# Altium PCB HU_MAIN_PCB_revA.PcbDoc (part 1 of 3)
Units mm, origin at the board's own origin, x right, y up, seen from the top; angles counter-clockwise.
Board outline 136.5 x 85 mm, 4 copper layers (Top Layer, Layer 1, Layer 2, Bottom Layer), stack 1.586 mm thick; 169 components, 126 nets, 634 pads, 1057 vias.
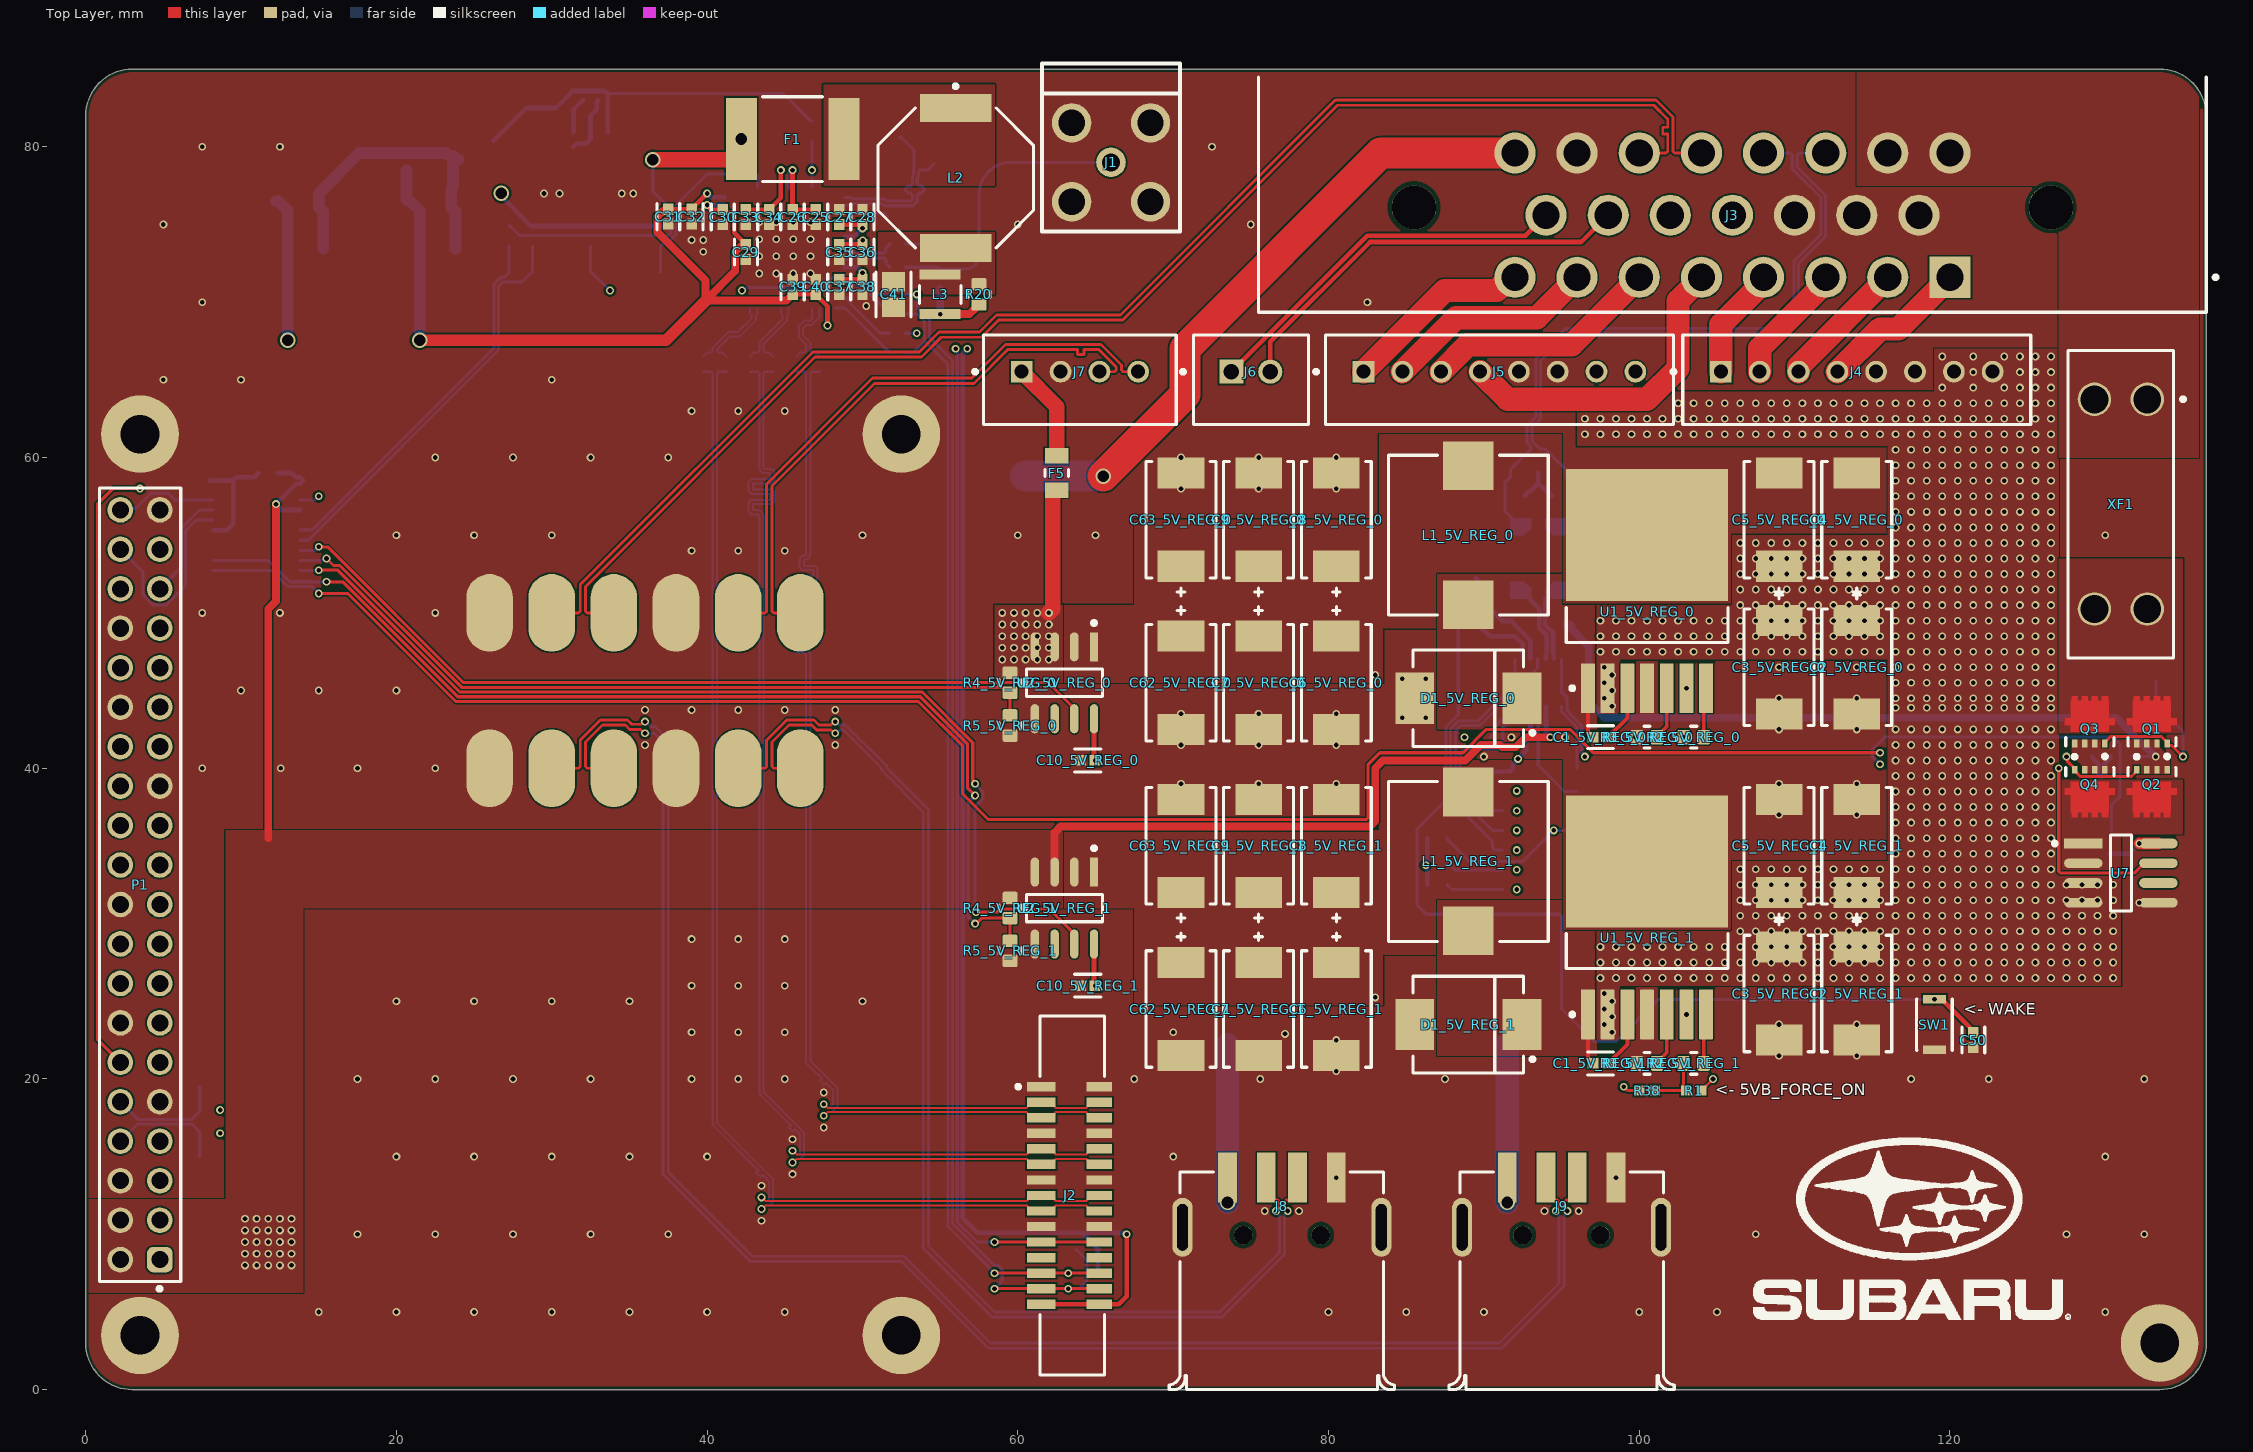
[diagram p0: Top Layer view]
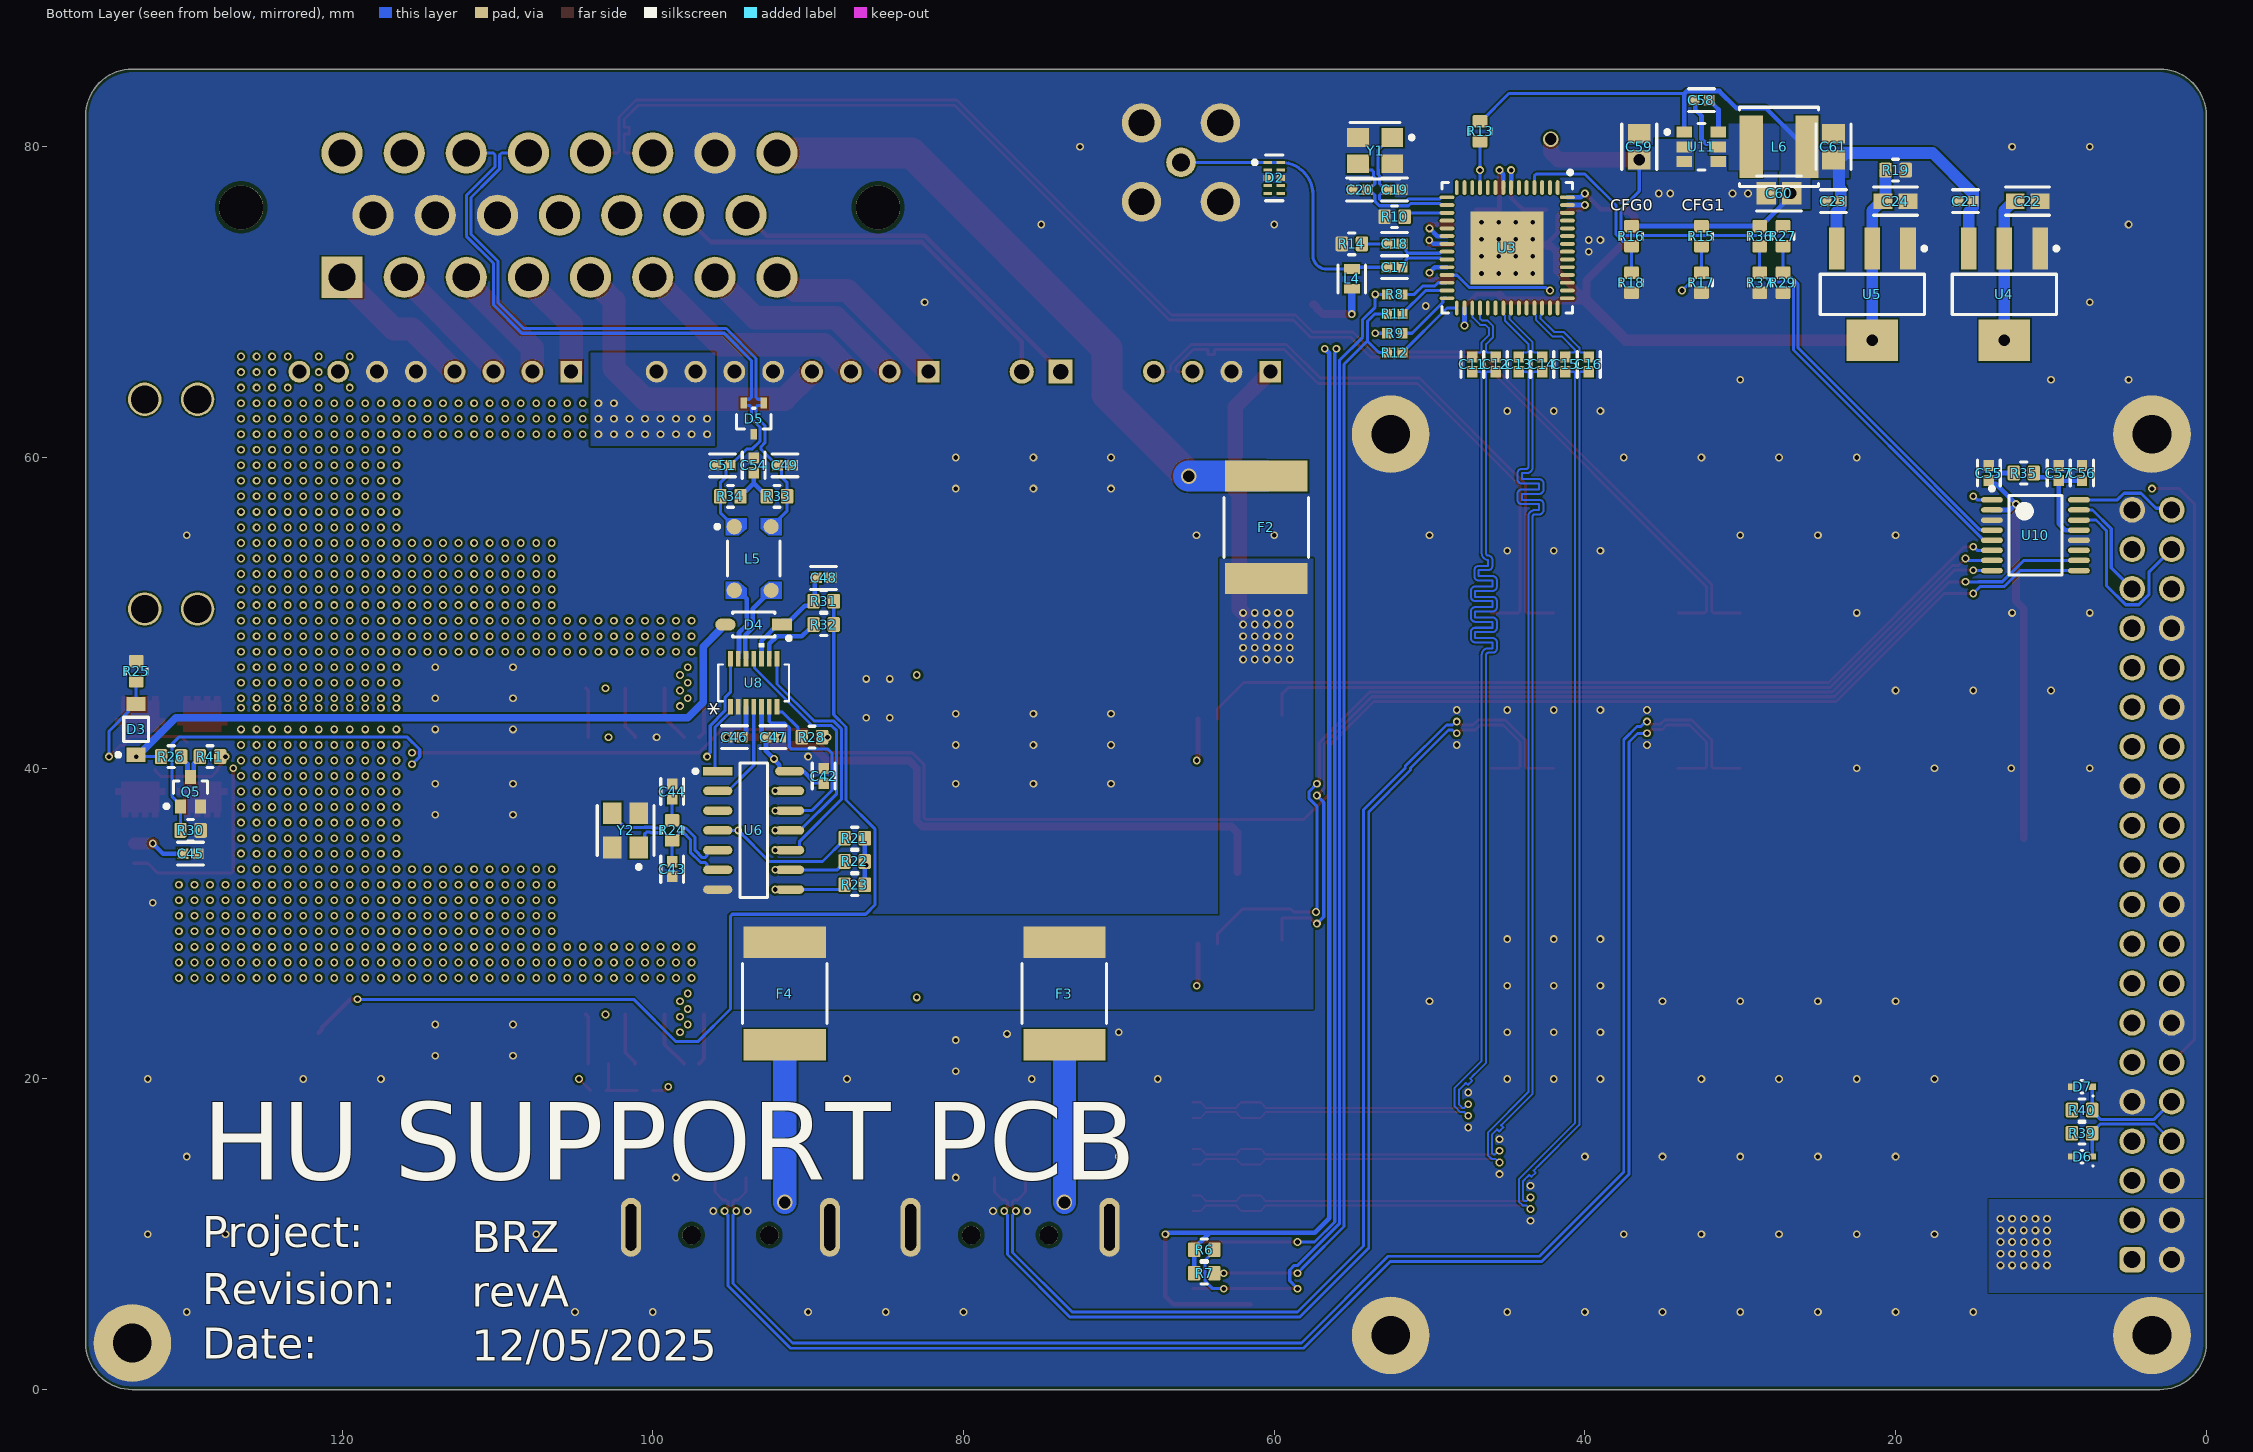
[diagram p1: Bottom Layer view, seen from below]
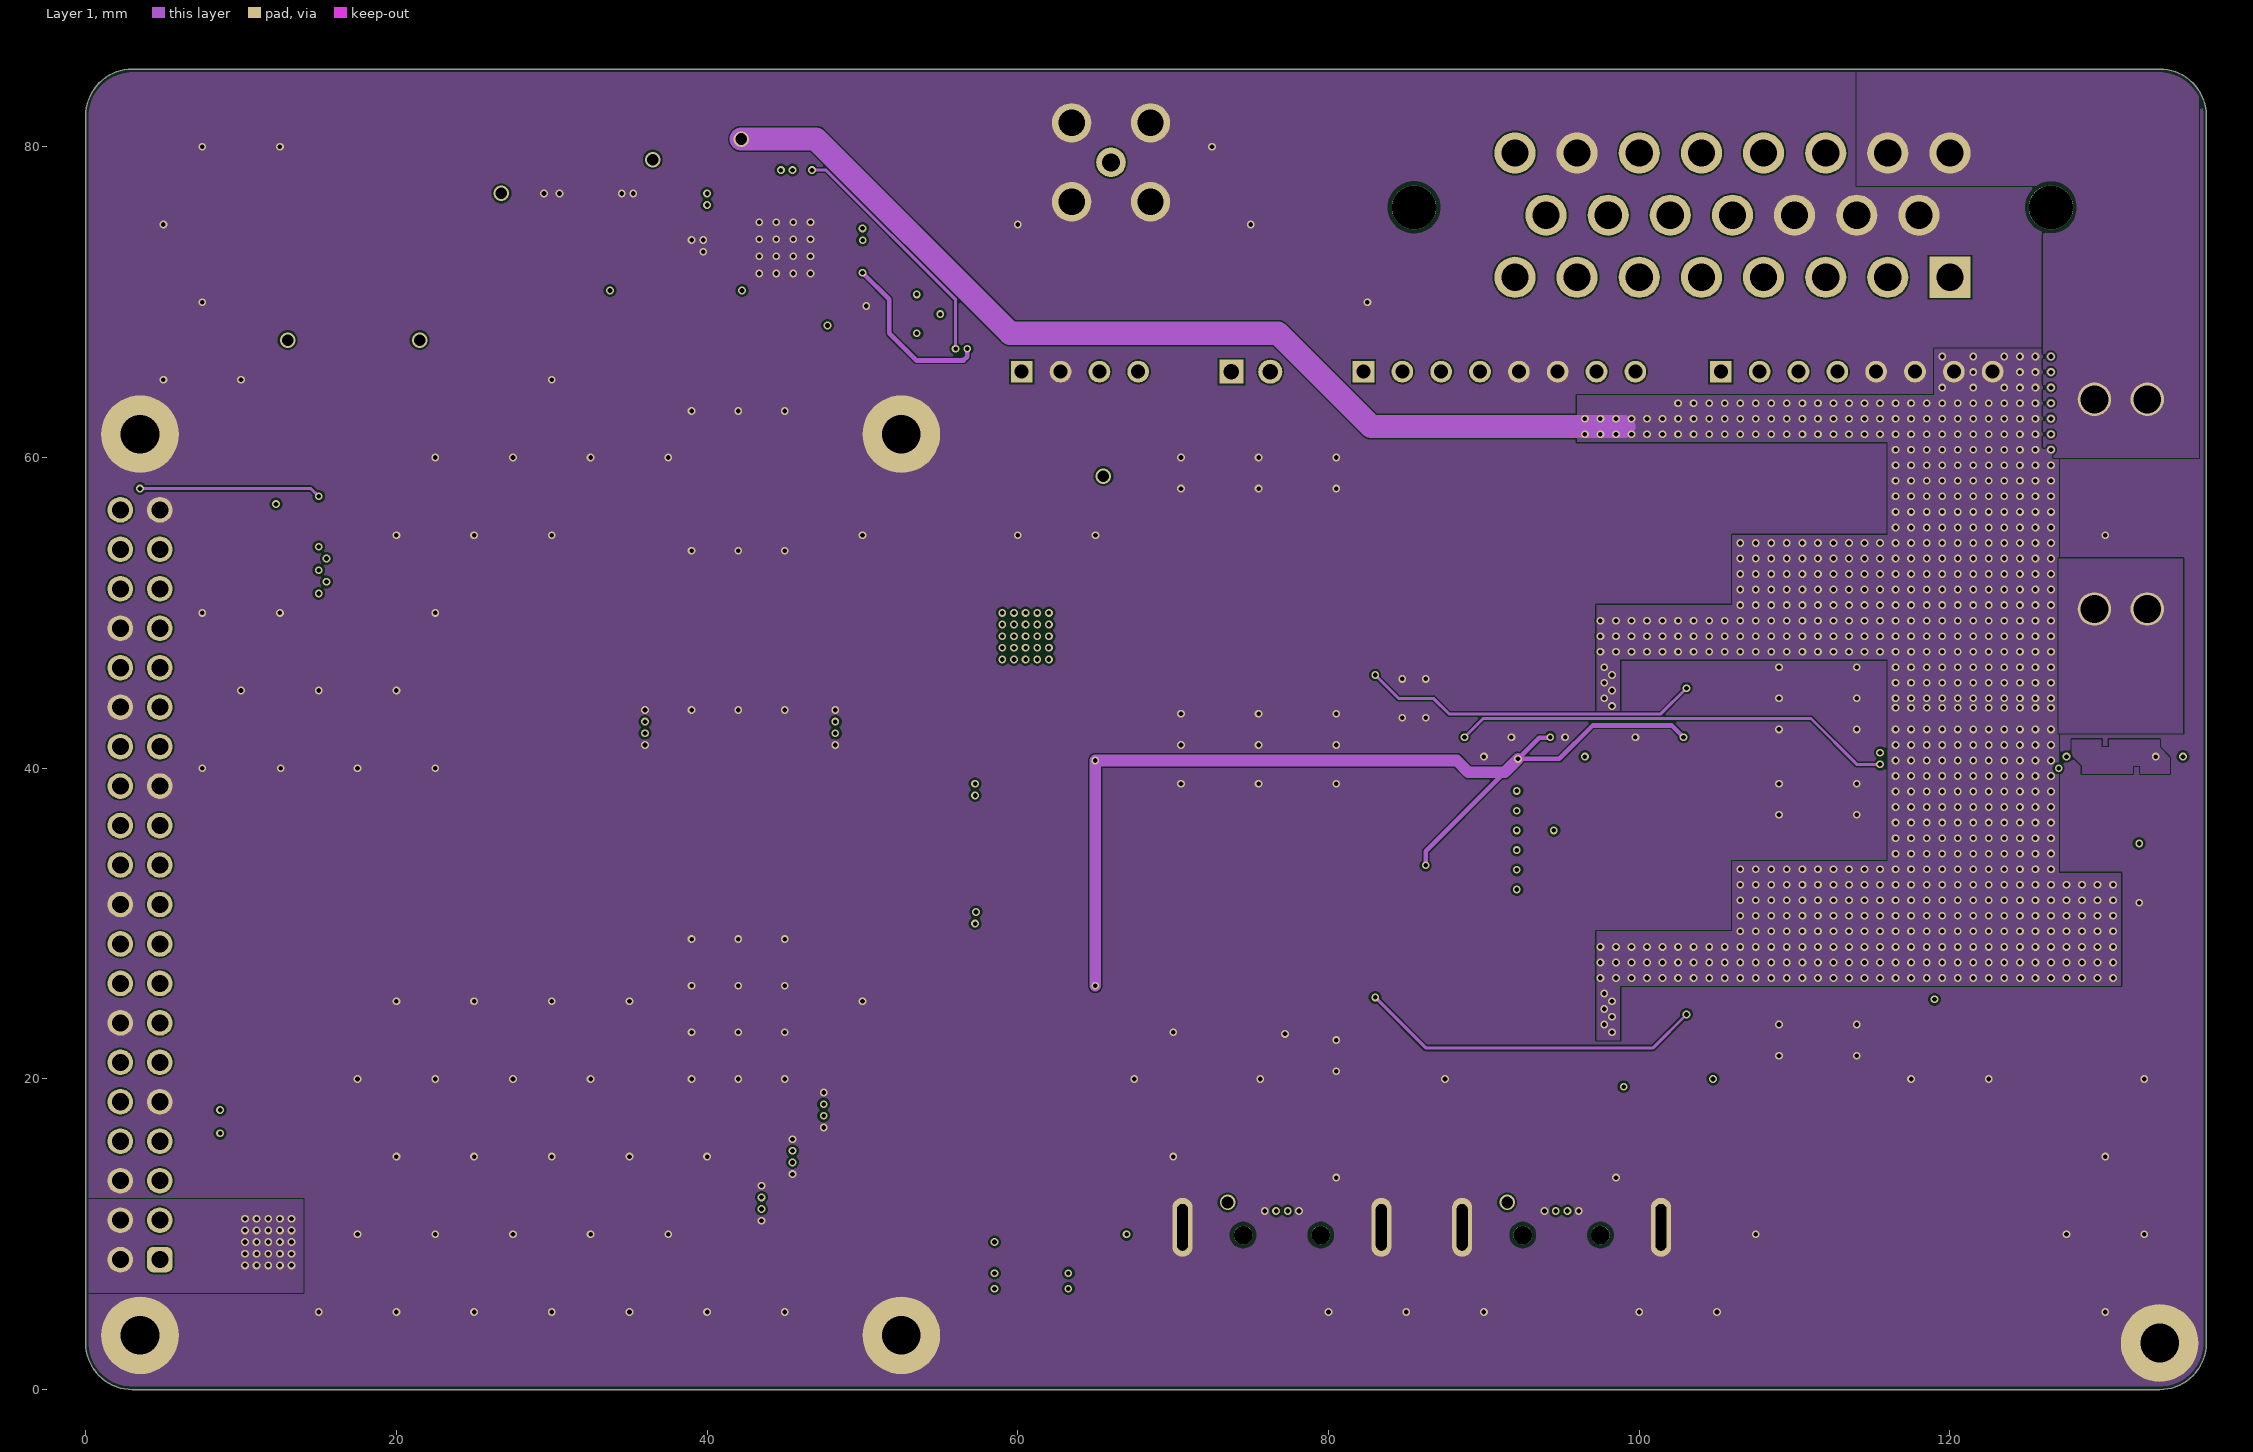
[diagram p2: Layer 1]
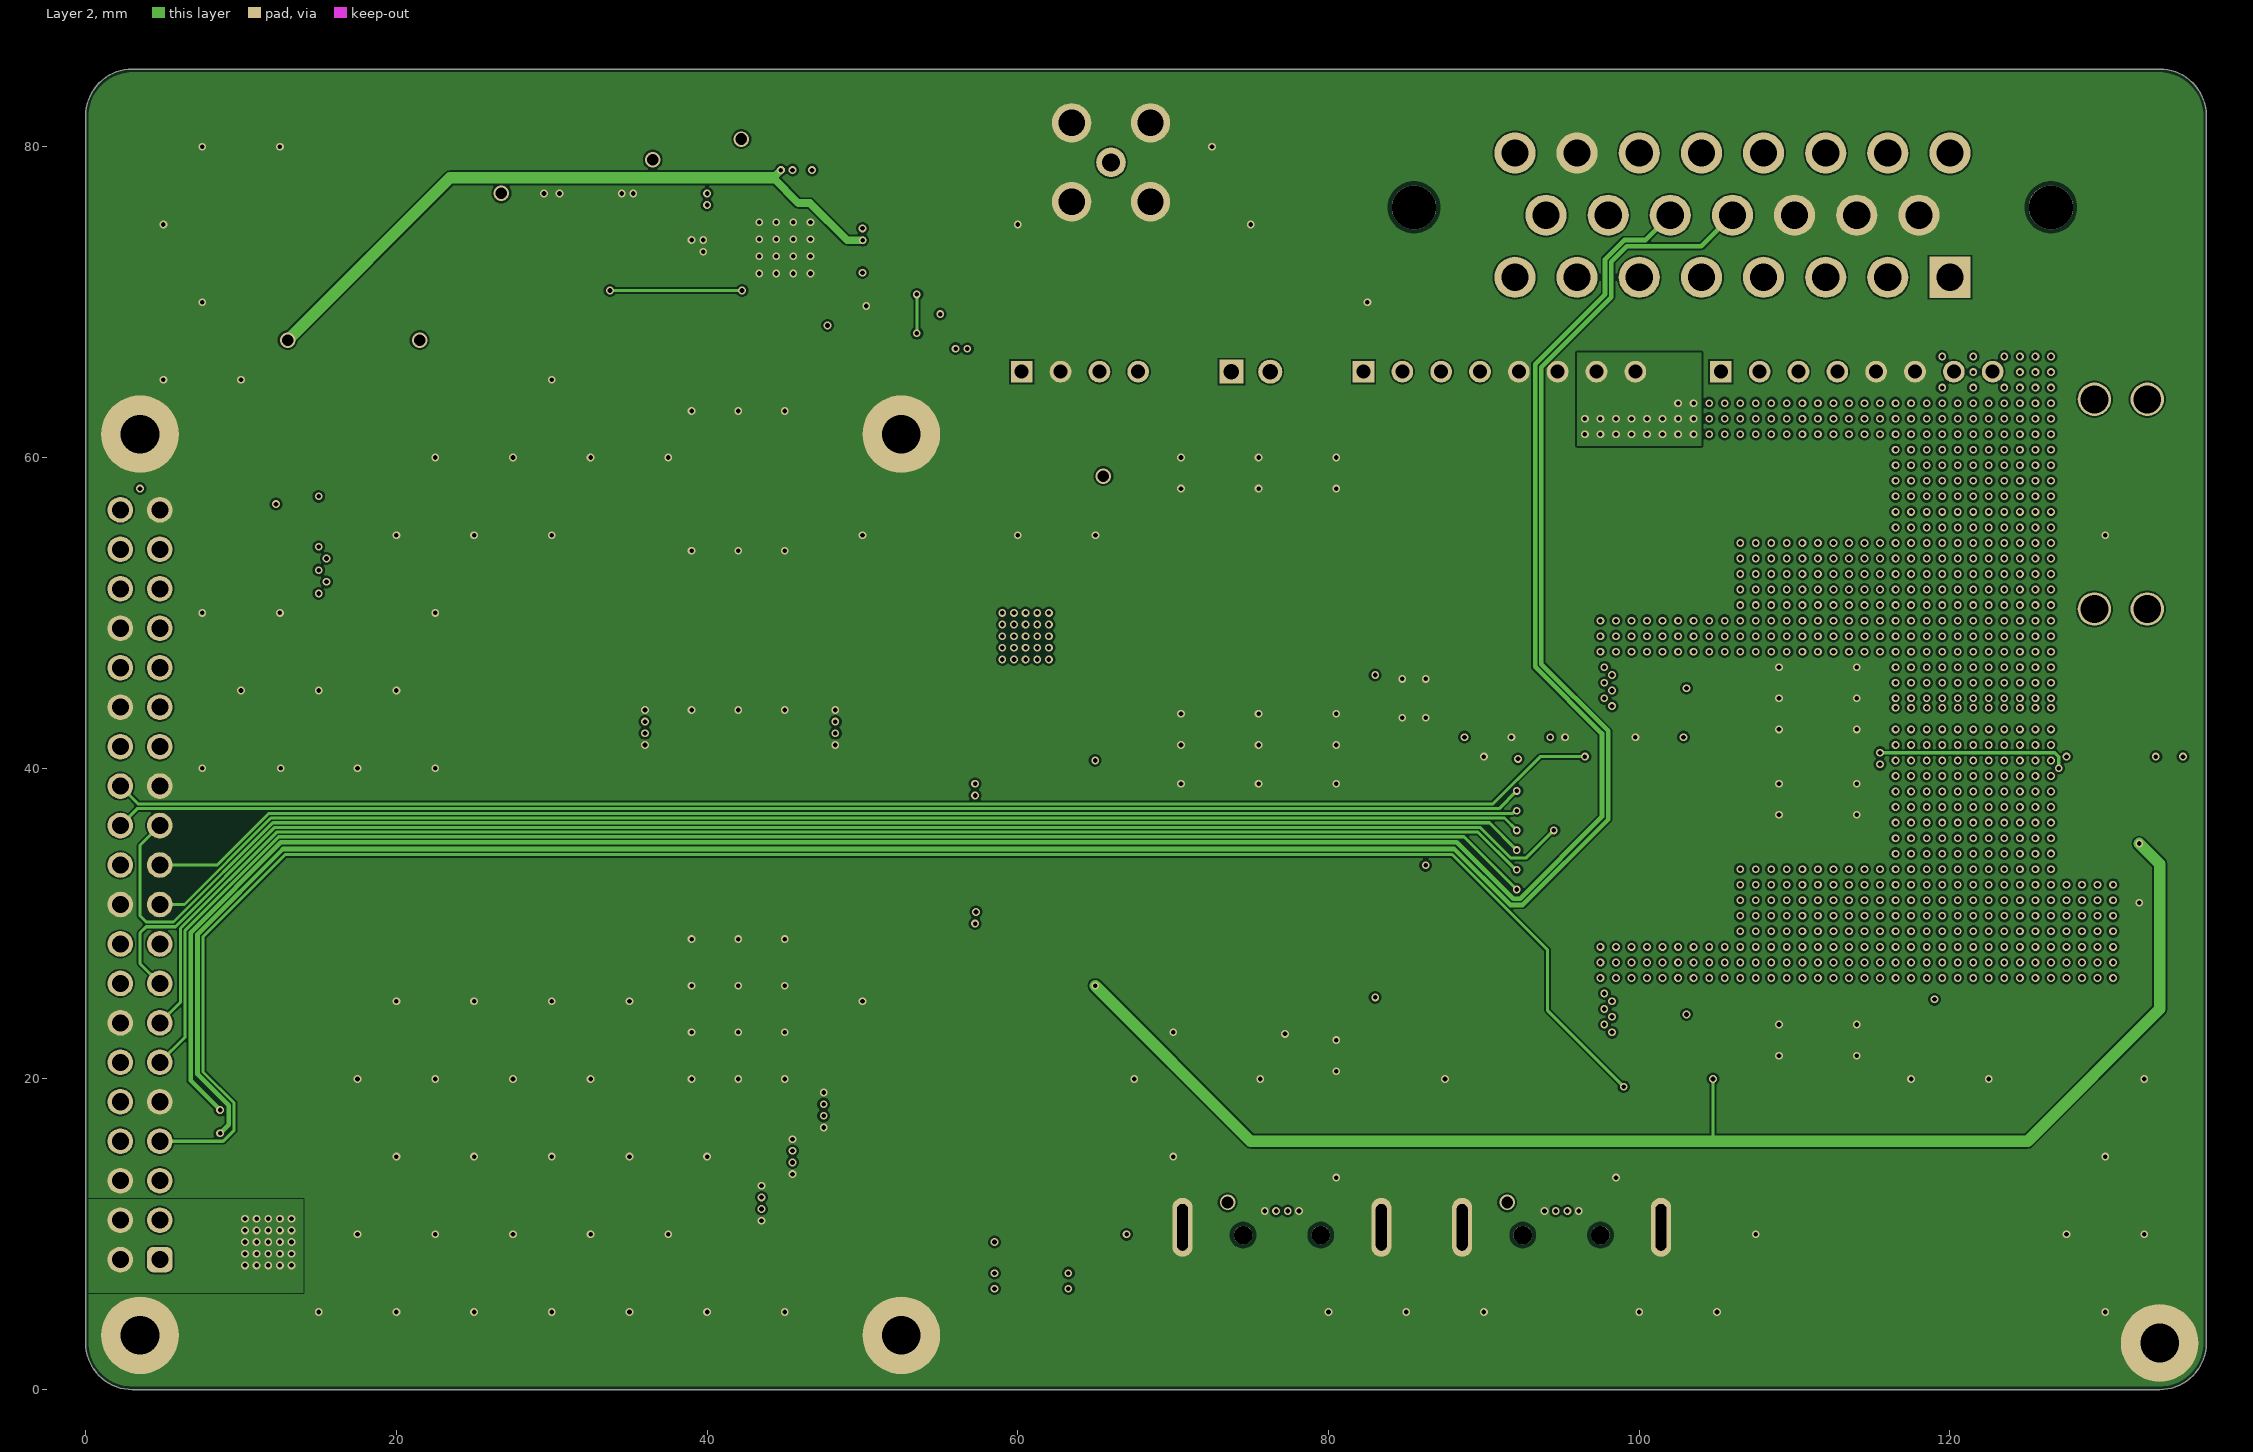
[diagram p3: Layer 2]
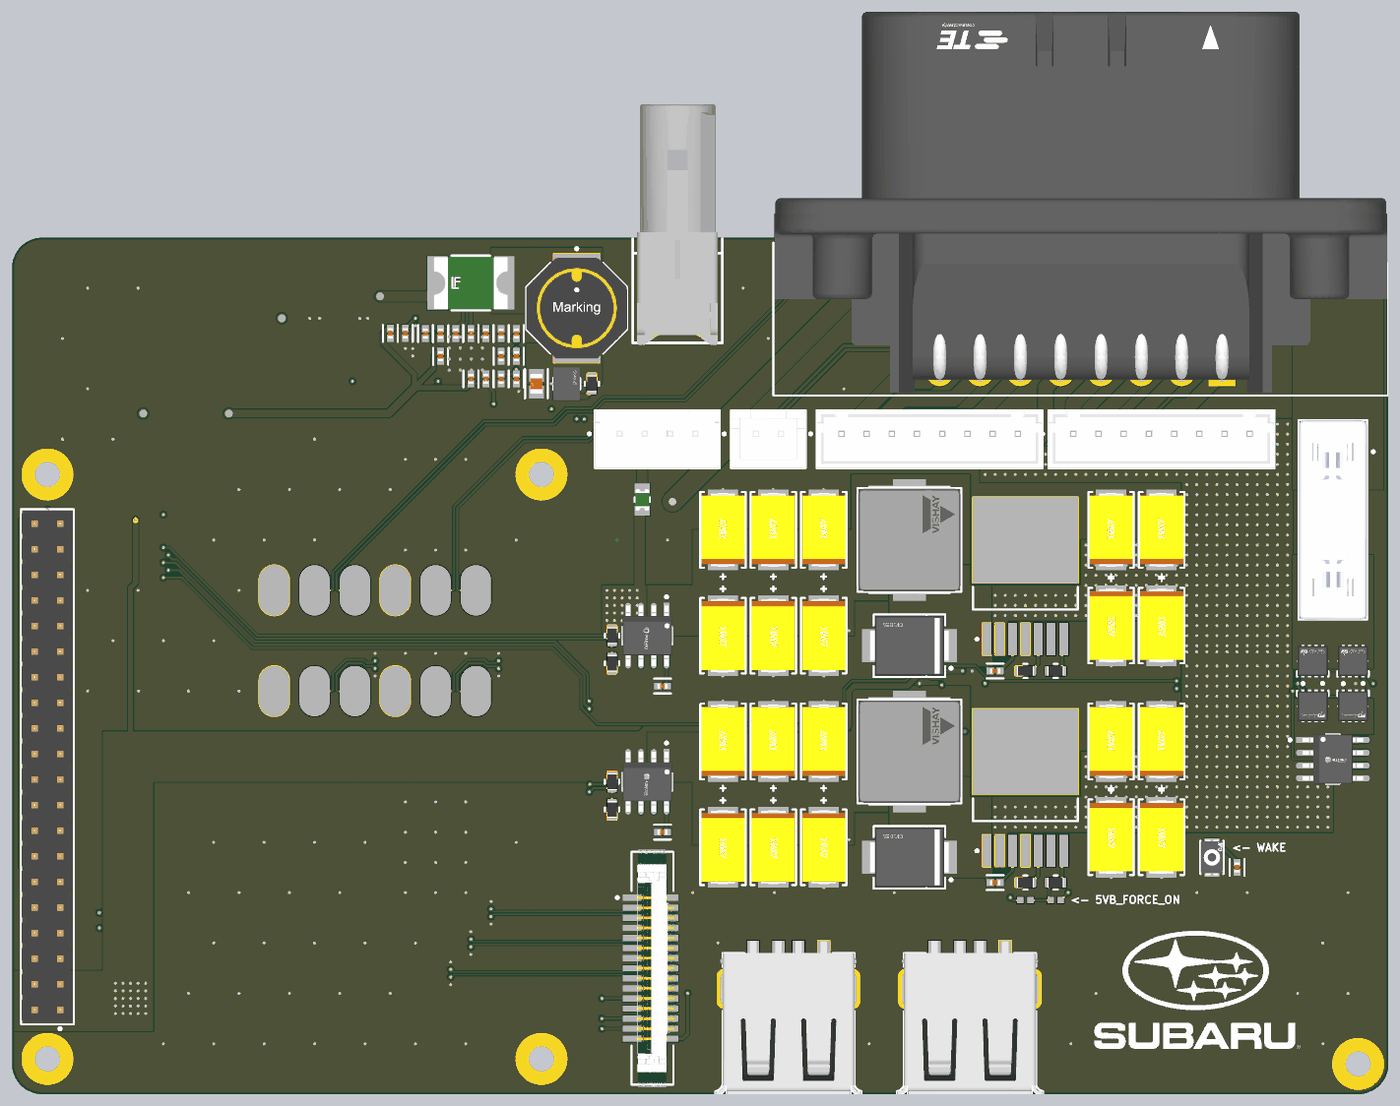
[diagram p5: 3D render of the assembled board from above, using the file's embedded part models]
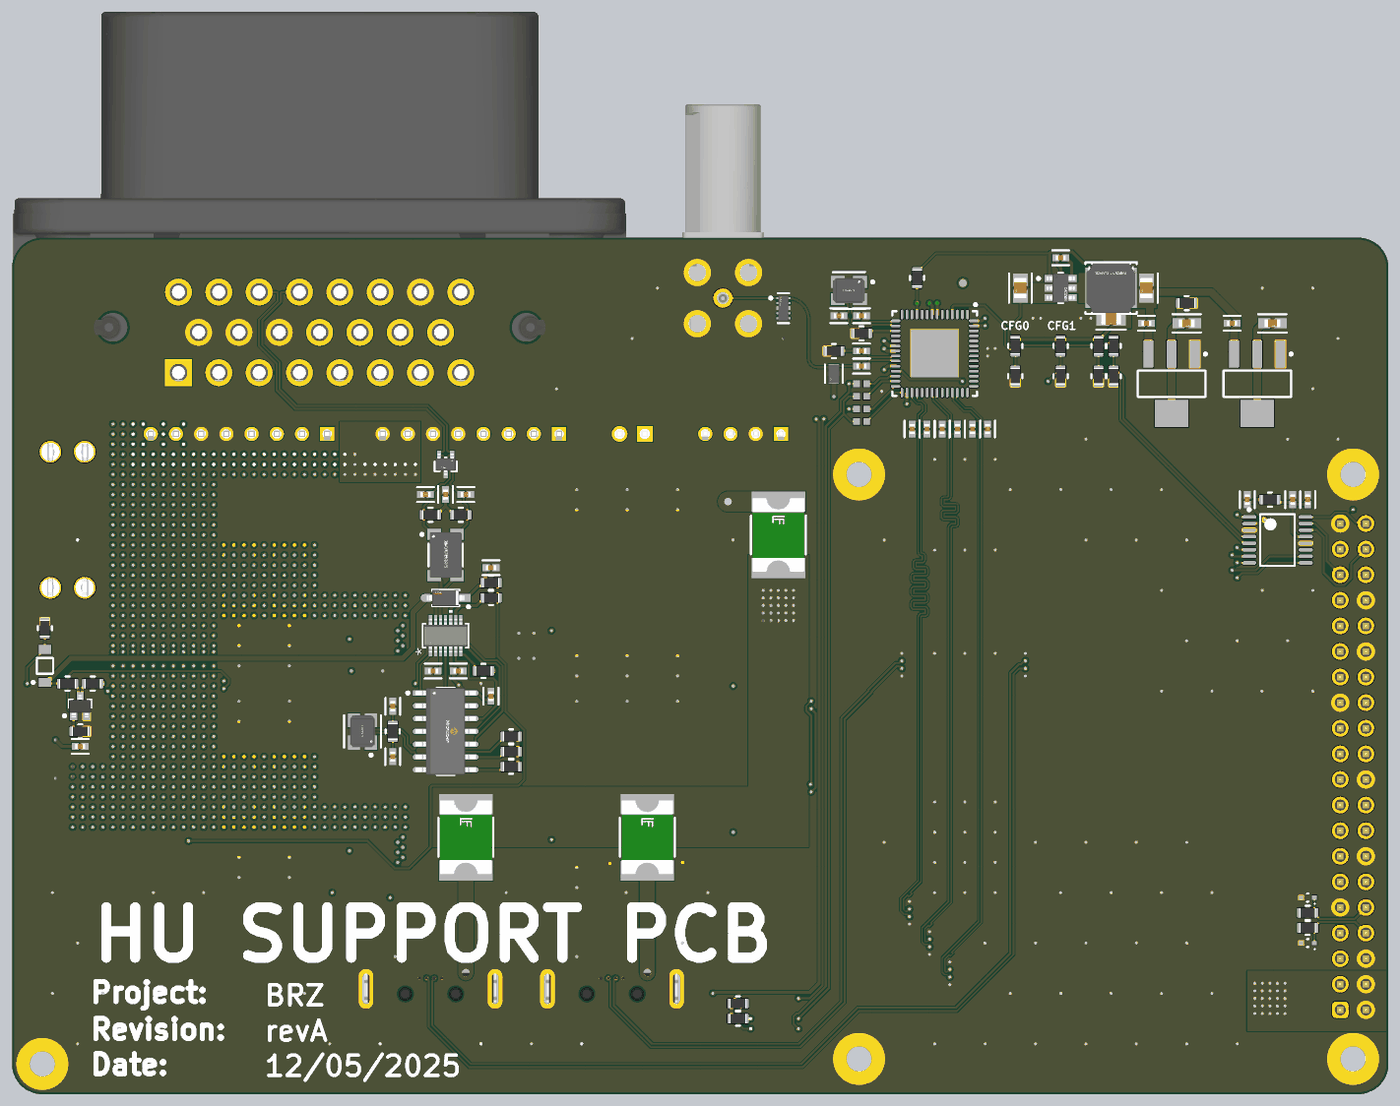
[diagram p6: 3D render of the assembled board from below, using the file's embedded part models]

## Layer stack, top to bottom
Top Solder: solder mask 0.0102, Solder Resist, Dk 3.5
Top Layer: signal copper 0.035
Dielectric 2: prepreg 0.2104, PP-006, Dk 4.1
Layer 1: signal copper 0.0152
Dielectric 1: dielectric 1.065, FR-4, Dk 4.8
Layer 2: signal copper 0.0152
Dielectric 3: prepreg 0.2104, PP-006, Dk 4.1
Bottom Layer: signal copper 0.035
Bottom Solder: solder mask 0.0102, Solder Resist, Dk 3.5

## Board outline
0,3 0,82 cw(c3,82) 3,85 133.5,85 cw(c133.5,82) 136.5,82 136.5,3 cw(c133.5,3) 133.5,0 3,0 cw(c3,3)

## Design rules (kind name [scope] priority, off if disabled: settings)
BoardOutlineClearance [All] p1: gap=0.2 ignorepadtopadclearanceinfootprint=FALSE
Clearance [All] p1: gap=0.102 ignorepadtopadclearanceinfootprint=FALSE except(0.127: Arc-Via Track-Via SMDPad-Via THPad-Via Via-Via Via-Fill Via-Poly Via-Region Via-Text; 0.25: Arc-Hole Track-Hole SMDPad-Hole THPad-Hole Via-Hole Fill-Hole Poly-Hole Region-Hole Text-Hole)
ComponentClearance [All] p1: gap=0.102 collisioncheckmode=3 verticalgap=0.102 showdistances=TRUE
DiffPairsRouting USB [InDifferentialPairClass('USB')] p1: maxlimit=0.15 minlimit=0.127 mostfreqgap=0.15 toplayer_mingap=0.15 toplayer_minwidth=0.184 toplayer_maxwidth=0.184 toplayer_prefwidth=0.184 midlayer1_maxgap=0.127 midlayer1_prefgap=0.127 midlayer1_minwidth=0.134 midlayer1_maxwidth=0.134 midlayer1_prefwidth=0.134 midlayer2_maxgap=0.127 midlayer2_prefgap=0.127 midlayer2_minwidth=0.134 midlayer2_maxwidth=0.134 midlayer2_prefwidth=0.134 bottomlayer_mingap=0.15 bottomlayer_minwidth=0.184 bottomlayer_maxwidth=0.184 bottomlayer_prefwidth=0.184 impedanceprofiledriven=TRUE impedanceprofileid={04CC540B-F58B-4300-971F-239DCF8936D9} impedanceprofilevalue=90.000000 maxuncoupledlength=12.7
DiffPairsRouting CSI [InDifferentialPairClass('CSI0') OR InDifferentialPairClass('CSI0_PRE') OR InDifferentialPairClass('100DIFF')] p2: maxlimit=0.15 minlimit=0.127 mostfreqgap=0.15 toplayer_mingap=0.15 toplayer_minwidth=0.13 toplayer_maxwidth=0.13 toplayer_prefwidth=0.13 midlayer1_maxgap=0.127 midlayer1_prefgap=0.127 midlayer1_minwidth=0.096 midlayer1_maxwidth=0.096 midlayer1_prefwidth=0.096 midlayer2_maxgap=0.127 midlayer2_prefgap=0.127 midlayer2_minwidth=0.096 midlayer2_maxwidth=0.096 midlayer2_prefwidth=0.096 bottomlayer_mingap=0.15 bottomlayer_minwidth=0.13 bottomlayer_maxwidth=0.13 bottomlayer_prefwidth=0.13 impedanceprofiledriven=TRUE impedanceprofileid={F67F527D-6E9B-4A25-A764-75998AE40894} impedanceprofilevalue=100.000000 maxuncoupledlength=12.7
DiffPairsRouting [All] p3: maxlimit=0.102 minlimit=0.102 mostfreqgap=0.102 toplayer_minwidth=0.102 toplayer_maxwidth=1816.048 toplayer_prefwidth=0.102 midlayer1_minwidth=0.102 midlayer1_maxwidth=1816.048 midlayer1_prefwidth=0.102 midlayer2_minwidth=0.102 midlayer2_maxwidth=1816.048 midlayer2_prefwidth=0.102 bottomlayer_minwidth=0.102 bottomlayer_maxwidth=1816.048 bottomlayer_prefwidth=0.102 maxuncoupledlength=12.7
Height [All] p1: minheight=0 maxheight=1816.048 prefheight=12.7
HoleSize [All] p1: absolutevalues=TRUE maxlimit=6.3 minlimit=0.2 maxpercent=80.000 minpercent=20.000
HoleToHoleClearance [All] p1: gap=0.25 allowstackedmicrovias=FALSE
MatchedLengths USB_INTRA [All] p1: tolerance=25.4 checknetsindiffpair=TRUE checkdiffpairvsdiffpair=FALSE checkxsignals=FALSE checkothers=FALSE usedelayunits=TRUE delaytolerance=5.000000
MatchedLengths CSI0_PRE_INTER [InDifferentialPairClass('CSI0_PRE')] p2: tolerance=25.4 checknetsindiffpair=FALSE checkdiffpairvsdiffpair=TRUE checkxsignals=TRUE checkothers=TRUE usedelayunits=TRUE delaytolerance=5.000000
MatchedLengths CSI0_INTER [InDifferentialPairClass('CSI0')] p3: tolerance=25.4 checknetsindiffpair=FALSE checkdiffpairvsdiffpair=TRUE checkxsignals=TRUE checkothers=TRUE usedelayunits=TRUE delaytolerance=5.000000
MatchedLengths CSI_INTRA [InDifferentialPairClass('CSI0_PRE') OR InDifferentialPairClass('CSI0') OR InDifferentialPairClass('100DIFF')] p4: tolerance=25.4 checknetsindiffpair=TRUE checkdiffpairvsdiffpair=FALSE checkxsignals=FALSE checkothers=FALSE usedelayunits=TRUE delaytolerance=1.000000
MinimumAnnularRing [All] p1: minimumring=0.076
MinimumSolderMaskSliver [All] p1: minsoldermaskwidth=0
PlaneClearance [All] p1: clearance=0.102
PlaneConnect PlaneConnectPowerPads [InPadClass('PowerPads')] p1: planeconnectstyle=Direct reliefexpansion=0.508 reliefentries=4 reliefconductorwidth=0.254 reliefairgap=0.254
PlaneConnect [All] p2: planeconnectstyle=Direct reliefexpansion=0.3 reliefentries=4 reliefconductorwidth=0.102 reliefairgap=0.102
PolygonConnect PolygonConnectPowerPads [All vs (InPadClass('PowerPads'))] p1: connectstyle=Direct reliefconductorwidth=0.254 reliefentries=4 polygonreliefangle="90 Angle" airgapwidth=0.254
PolygonConnect [All] p2: connectstyle=Direct reliefconductorwidth=0.102 reliefentries=4 polygonreliefangle="90 Angle" airgapwidth=0.102
RoomDefinition 5V_REG_0 [InComponentClass('5V_REG_0')] p1: confinementstyle=ConfineIn formatcopy=TRUE lockcomponents=FALSE outline 117,61.5 58,61.5 58,41 117,41
RoomDefinition 5V_REG_1 [InComponentClass('5V_REG_1')] p2: confinementstyle=ConfineIn formatcopy=TRUE lockcomponents=FALSE outline 117,40.5 58,40.5 58,20 117,20
RoutingVias [All] p1: holewidth=0.2 width=0.45 viastyle="Through Hole" minholewidth=0.2 minwidth=0.45 maxholewidth=6.3 maxwidth=6.55
SilkToSilkClearance [All] p1: silktosilkclearance=0
SilkToSolderMaskClearance [IsPad] p1: minsilkscreentomaskgap=0.102 clearancetoexposedcopper=TRUE
SolderMaskExpansion [All] p1: expansion=0.075 istentingtop=FALSE
SupplyNets "Schematic Supply Nets_4" [InNet('GND')] p1: voltage=0.000
SupplyNets "Schematic Supply Nets_3" [InNet('3V3')] p2: voltage=0.000
SupplyNets "Schematic Supply Nets_2" [InNet('5VB')] p3: voltage=0.000
SupplyNets "Schematic Supply Nets_1" [InNet('5VA')] p4: voltage=0.000
SupplyNets "Schematic Supply Nets" [InNet('PoC_PWR')] p5: voltage=0.000
Width GMSL [InNetClass('50SINGLE')] p1: maxlimit=0.199 minlimit=0.187 preferedwidth=0.199 toplayer_minwidth=0.199 midlayer1_maxwidth=0.187 midlayer1_prefwidth=0.187 midlayer2_maxwidth=0.187 midlayer2_prefwidth=0.187 bottomlayer_minwidth=0.199 impedanceprofiledriven=TRUE impedanceprofileid={BAE55BD6-D239-4071-A339-42014D65D358} impedanceprofilevalue=50.000000 minimp=50.000000 maximp=50.000000 favimp=50.000000
Width [All] p2: maxlimit=1816.048 minlimit=0.102 preferedwidth=0.102
20 further rules are at their usual default settings.

## Classes and differential pairs
differential pair class USB: AUX_USB_D DAC_USB_D RPI_USB0_D RPI_USB1_D
differential pair class CAN: CAN PRE_CAN
differential pair class CSI0: CKA CKC DA0 DA1
differential pair class CSI0_PRE: CSI_CLK CSI_D0 CSI_D1
differential pair class 100DIFF: SIOA
channel class 5V_REG: 5V_REG_0 5V_REG_1
net class PWR: NetC41_1 NetF1_2 NetL3_2 PoC_PWR
net class 50SINGLE: PoC_A
component class PWR_MGMT: C45 C46 C47 C48 C49 C50 C51 C54 D3 D4 D5 L5 Q1 Q2 Q3 Q4 Q5 R25 R26 R27 R28 R29 R30 R31 R32 R33 R34 R41 SW1 U7 U8 XF1
component class HU_MAIN_PCB_revA: D6 D7 F2 F3 F4 F5 J1 J2 J3 J4 J5 J6 J7 J8 J9 P1 R1 R38 R39 R40
component class GMSL_DESERIALIZER_0: C11 C12 C13 C14 C15 C16 C17 C18 C19 C20 C21 C22 C23 C24 C25 C26 C27 C28 C29 C30 C31 C32 C33 C34 C35 C36 C37 C38 C39 C40 C41 D2 F1 L2 L3 L4 R6 R7 R8 R9 R10 R11 R12 R13 R14 R15 R16 R17 R18 R19 R20 U3 U4 U5 Y1
component class CAN_CTRLR_0: C42 C43 C44 R21 R22 R23 R24 U6 Y2
component class ADC_0: C55 C56 C57 R35 U10
component class 5V_REG_1: C1_5V_REG_1 C2_5V_REG_1 C3_5V_REG_1 C4_5V_REG_1 C5_5V_REG_1 C6_5V_REG_1 C7_5V_REG_1 C8_5V_REG_1 C9_5V_REG_1 C10_5V_REG_1 C62_5V_REG_1 C63_5V_REG_1 D1_5V_REG_1 L1_5V_REG_1 R2_5V_REG_1 R3_5V_REG_1 R4_5V_REG_1 R5_5V_REG_1 U1_5V_REG_1 U2_5V_REG_1
component class 5V_REG_0: C1_5V_REG_0 C2_5V_REG_0 C3_5V_REG_0 C4_5V_REG_0 C5_5V_REG_0 C6_5V_REG_0 C7_5V_REG_0 C8_5V_REG_0 C9_5V_REG_0 C10_5V_REG_0 C62_5V_REG_0 C63_5V_REG_0 D1_5V_REG_0 L1_5V_REG_0 R2_5V_REG_0 R3_5V_REG_0 R4_5V_REG_0 R5_5V_REG_0 U1_5V_REG_0 U2_5V_REG_0
component class 3V3_REG_0: C58 C59 C60 C61 L6 R36 R37 U11
differential pair RPI_USB1_D: +RPI_USB1_D_P -RPI_USB1_D_N
differential pair RPI_USB0_D: +RPI_USB0_D_P -RPI_USB0_D_N
differential pair DAC_USB_D: +DAC_USB_D_P -DAC_USB_D_N
differential pair AUX_USB_D: +AUX_USB_D_P -AUX_USB_D_N
differential pair CAN: +CAN_P -CAN_N
differential pair X25: +X25_P -X25_N
differential pair X20: +X20_P -X20_N
differential pair SIOA: +SIOA_P -SIOA_N
differential pair PRE_CAN: +PRE_CAN_P -PRE_CAN_N
differential pair DA1: +DA1_P -DA1_N
differential pair DA0: +DA0_P -DA0_N
differential pair CSI_D1: +CSI_D1_P -CSI_D1_N
differential pair CSI_D0: +CSI_D0_P -CSI_D0_N
differential pair CSI_CLK: +CSI_CLK_P -CSI_CLK_N
differential pair CKA: +CKA_P -CKA_N

## Components (designator, comment, footprint, x,y, rotation, side; value= is the part's Value field where it differs from the comment)
C1_5V_REG_0 "10n" FP-0402-L_1_0_0_05-W_0_5-IPC_A 97.5,42 r180 top (schematic designator C1)
C1_5V_REG_1 "10n" FP-0402-L_1_0_0_05-W_0_5-IPC_A 97.5,21 r180 top (schematic designator C1)
C2_5V_REG_0 "TPSE686K025R0125" FP-TPSE-MFG 114,46.5 r90 top (schematic designator C2)
C2_5V_REG_1 "TPSE686K025R0125" FP-TPSE-MFG 114,25.5 r90 top (schematic designator C2)
C3_5V_REG_0 "TPSE686K025R0125" FP-TPSE-MFG 109,46.5 r90 top (schematic designator C3)
C3_5V_REG_1 "TPSE686K025R0125" FP-TPSE-MFG 109,25.5 r90 top (schematic designator C3)
C4_5V_REG_0 "TPSE686K025R0125" FP-TPSE-MFG 114,56 r270 top (schematic designator C4)
C4_5V_REG_1 "TPSE686K025R0125" FP-TPSE-MFG 114,35 r270 top (schematic designator C4)
C5_5V_REG_0 "TPSE686K025R0125" FP-TPSE-MFG 109,56 r270 top (schematic designator C5)
C5_5V_REG_1 "TPSE686K025R0125" FP-TPSE-MFG 109,35 r270 top (schematic designator C5)
C6_5V_REG_0 "TPSE686K025R0125" FP-TPSE-MFG 80.5,45.5 r90 top (schematic designator C6)
C6_5V_REG_1 "TPSE686K025R0125" FP-TPSE-MFG 80.5,24.5 r90 top (schematic designator C6)
C7_5V_REG_0 "TPSE686K025R0125" FP-TPSE-MFG 75.5,45.5 r90 top (schematic designator C7)
C7_5V_REG_1 "TPSE686K025R0125" FP-TPSE-MFG 75.5,24.5 r90 top (schematic designator C7)
C8_5V_REG_0 "TPSE686K025R0125" FP-TPSE-MFG 80.5,56 r270 top (schematic designator C8)
C8_5V_REG_1 "TPSE686K025R0125" FP-TPSE-MFG 80.5,35 r270 top (schematic designator C8)
C9_5V_REG_0 "TPSE686K025R0125" FP-TPSE-MFG 75.5,56 r270 top (schematic designator C9)
C9_5V_REG_1 "TPSE686K025R0125" FP-TPSE-MFG 75.5,35 r270 top (schematic designator C9)
C10_5V_REG_0 "100n" FP-0402-L_1_0_0_05-W_0_5-IPC_A 64.5,40.5 r0 top (schematic designator C10)
C10_5V_REG_1 "100n" FP-0402-L_1_0_0_05-W_0_5-IPC_A 64.5,26 r0 top (schematic designator C10)
C11 "100n" FP-0402-L_1_0_0_05-W_0_5-IPC_A 47.25,66 r270 bottom
C12 "100n" FP-0402-L_1_0_0_05-W_0_5-IPC_A 45.75,66 r270 bottom
C13 "100n" FP-0402-L_1_0_0_05-W_0_5-IPC_A 44.25,66 r270 bottom
C14 "100n" FP-0402-L_1_0_0_05-W_0_5-IPC_A 42.75,66 r270 bottom
C15 "100n" FP-0402-L_1_0_0_05-W_0_5-IPC_A 41.25,66 r270 bottom
C16 "100n" FP-0402-L_1_0_0_05-W_0_5-IPC_A 39.75,66 r270 bottom
C17 "100n" FP-0402-L_1_0_0_05-W_0_5-IPC_A 52.25,72.25 r0 bottom value=220n
C18 "100n" FP-0402-L_1_0_0_05-W_0_5-IPC_A 52.25,73.75 r0 bottom value=220n
C19 "30p" FP-0402-L_1_0_0_05-W_0_5-IPC_A 52.25,77.25 r0 bottom
C20 "30p" FP-0402-L_1_0_0_05-W_0_5-IPC_A 54.5,77.25 r180 bottom
C21 "100n" FP-0402-L_1_0_0_05-W_0_5-IPC_A 15.5,76.5 r180 bottom
C22 "GRM188R60J106ME47D" FP-GRM188-0_1-e0_2_0_55-IPC_A 11.5,76.5 r180 bottom
C23 "100n" FP-0402-L_1_0_0_05-W_0_5-IPC_A 24,76.5 r180 bottom
C24 "GRM188R60J106ME47D" FP-GRM188-0_1-e0_2_0_55-IPC_A 20,76.5 r180 bottom
C25 "10u" FP-0402-L_1_0_0_05-W_0_5-IPC_A 47,75.479 r90 top
C26 "100n" FP-0402-L_1_0_0_05-W_0_5-IPC_A 45.5,75.479 r90 top
C27 "10u" FP-0402-L_1_0_0_05-W_0_5-IPC_A 48.5,75.479 r270 top
C28 "100n" FP-0402-L_1_0_0_05-W_0_5-IPC_A 50,75.479 r270 top
C29 "10u" FP-0402-L_1_0_0_05-W_0_5-IPC_A 42.5,73.229 r90 top
C30 "100n" FP-0402-L_1_0_0_05-W_0_5-IPC_A 41,75.479 r90 top
C31 "10u" FP-0402-L_1_0_0_05-W_0_5-IPC_A 37.5,75.5 r90 top
C32 "100n" FP-0402-L_1_0_0_05-W_0_5-IPC_A 39,75.5 r90 top
C33 "10u" FP-0402-L_1_0_0_05-W_0_5-IPC_A 42.5,75.479 r90 top
C34 "10n" FP-0402-L_1_0_0_05-W_0_5-IPC_A 44,75.479 r90 top
C35 "10u" FP-0402-L_1_0_0_05-W_0_5-IPC_A 48.5,73.229 r90 top
C36 "10n" FP-0402-L_1_0_0_05-W_0_5-IPC_A 50,73.229 r90 top
C37 "10u" FP-0402-L_1_0_0_05-W_0_5-IPC_A 48.5,70.979 r90 top
C38 "10n" FP-0402-L_1_0_0_05-W_0_5-IPC_A 50,70.979 r90 top
C39 "10u" FP-0402-L_1_0_0_05-W_0_5-IPC_A 45.5,70.979 r270 top
C40 "10n" FP-0402-L_1_0_0_05-W_0_5-IPC_A 47,70.979 r270 top
C41 "GRM21BR61E226ME44L" FP-GRM21B-0_2-e0_2_0_7-IPC_B 52,70.5 r270 top
C42 "100n" FP-0402-L_1_0_0_05-W_0_5-IPC_A 89,39.5 r90 bottom
C43 "30p" FP-0402-L_1_0_0_05-W_0_5-IPC_A 98.75,33.5 r270 bottom
C44 "30p" FP-0402-L_1_0_0_05-W_0_5-IPC_A 98.75,38.5 r90 bottom
C45 "100n" FP-0402-L_1_0_0_05-W_0_5-IPC_A 129.75,34.5 r180 bottom
C46 "100n" FP-0402-L_1_0_0_05-W_0_5-IPC_A 94.75,42 r0 bottom
C47 "100n" FP-0402-L_1_0_0_05-W_0_5-IPC_A 92.25,42 r180 bottom
C48 "100n" FP-0402-L_1_0_0_05-W_0_5-IPC_A 89,52.25 r180 bottom
C49 "6.6p" FP-0402-L_1_0_0_05-W_0_5-IPC_A 91.5,59.5 r180 bottom
C50 "100n" FP-0402-L_1_0_0_05-W_0_5-IPC_A 121.5,22.5 r270 top
C51 "6.6p" FP-0402-L_1_0_0_05-W_0_5-IPC_A 95.5,59.5 r180 bottom
C54 "100n" FP-0402-L_1_0_0_05-W_0_5-IPC_A 93.5,59.5 r270 bottom
C55 "100n" FP-0402-L_1_0_0_05-W_0_5-IPC_A 14,59 r90 bottom
C56 "100n" FP-0402-L_1_0_0_05-W_0_5-IPC_A 8,59 r90 bottom
C57 "100n" FP-0402-L_1_0_0_05-W_0_5-IPC_A 9.5,59 r90 bottom
C58 "100n" FP-0402-L_1_0_0_05-W_0_5-IPC_A 32.5,83 r0 bottom
C59 "GRM21BR61E226ME44L" FP-GRM21B-0_2-e0_2_0_7-IPC_B 36.5,80 r270 bottom
C60 "GRM21BR61E226ME44L" FP-GRM21B-0_2-e0_2_0_7-IPC_B 27.5,77 r180 bottom
C61 "GRM21BR61E226ME44L" FP-GRM21B-0_2-e0_2_0_7-IPC_B 24,80 r270 bottom
C62_5V_REG_0 "TPSE686K025R0125" FP-TPSE-MFG 70.5,45.5 r90 top (schematic designator C62)
C62_5V_REG_1 "TPSE686K025R0125" FP-TPSE-MFG 70.5,24.5 r90 top (schematic designator C62)
C63_5V_REG_0 "TPSE686K025R0125" FP-TPSE-MFG 70.5,56 r270 top (schematic designator C63)
C63_5V_REG_1 "TPSE686K025R0125" FP-TPSE-MFG 70.5,35 r270 top (schematic designator C63)
D1_5V_REG_0 "B540C-13-F" FP-SMC-MFG 89,44.5 r180 top value=300pF (schematic designator D1)
D1_5V_REG_1 "B540C-13-F" FP-SMC-MFG 89,23.5 r180 top value=300pF (schematic designator D1)
D2 "ESD204DQAR" FP-DQA0010A-MFG 60,78 r180 bottom value=0.55pF
D3 "MMSZ5242BT1G" ONSC-SOD-123-2-425-04_V 133.25,42.5 r90 bottom
D4 "1N4148W-TP" FP-SOD-123-IPC_A 93.5,49.25 r0 bottom
D5 "ESDCAN02-2BWY" FP-SOT323-3L-MFG 93.5,62.5 r270 bottom value=3pF
D6 "MM5Z3V3T1G" ONSC-SOD-523-2-502-01_V 8,15 r0 bottom
D7 "MM5Z3V3T1G" ONSC-SOD-523-2-502-01_V 8,19.5 r0 bottom
F1 "2920L050DR" FP-2920L050DR-MFG 45.5,80.5 r0 top
F2 "2920L050DR" FP-2920L050DR-MFG 60.5,55.5 r270 bottom
F3 "2920L050DR" FP-2920L050DR-MFG 73.5,25.5 r270 bottom
F4 "2920L050DR" FP-2920L050DR-MFG 91.5,25.5 r270 bottom
F5 "0ZCK0010FF2G" FP-0ZCK0010FF2G-MFG 62.5,59 r270 top
J1 "FA1-NDRP-PCB-8" FA1-NDRP-PCB-8-Footprint-1 66,79 r0 top
J2 "1-1734248-5" FP-1-1734248-5-MFG 63.5,12.5 r90 top
J3 "776087-1" FP-776087-1-MFG 106,88.5 r180 top locked
J4 "B8B-XH-A(LF)(SN)" FP-B8B-XH-A_LF_SN-MFG 114,65 r180 top
J5 "B8B-XH-A(LF)(SN)" FP-B8B-XH-A_LF_SN-MFG 91,65 r180 top
J6 "B2B-XH-A(LF)(SN)" FP-B2B-XH-A_LF_SN-MFG 75,65 r0 top
J7 "B4B-XH-A(LF)(SN)" FP-B4B-XH-A_LF_SN-MFG 64,65 r180 top
J8 "629104151021" 629104151021 77,7 r0 top
J9 "629104151021" 629104151021 95,7 r0 top
L1_5V_REG_0 "IHLP4040DZER220M11" FP-IHLP-4040DZ-FP_3_124x3-MFG 89,55 r90 top (schematic designator L1)
L1_5V_REG_1 "IHLP4040DZER220M11" FP-IHLP-4040DZ-FP_3_124x3-MFG 89,34 r90 top (schematic designator L1)
L2 "744066101" WE-TPC_1038 56,78 r0 top
L3 "ADL32VHC-220M" FP-1210POC-MFG 55,70.5 r270 top value=22uH
L4 "PFL1609-561MEW" FP-PFL1609-MFG 55,71.5 r90 bottom value=0.56uH
L5 "SRF4532-510Y" FP-SRF4532-MFG 93.5,53.5 r270 bottom
L6 "NR5040T4R7N" FP-NR5040-H_4_1-MFG 27.5,80 r180 bottom
P1 "61304021121" 61304021121 3.5,32.5 r90 top locked
Q1 "SISH615ADN-T1-GE3" SISH615ADN-T1-GE3-Footprint-1 132.963,42.99 r0 top
Q2 "SISH615ADN-T1-GE3" SISH615ADN-T1-GE3-Footprint-1 133.038,38.51 r180 top
Q3 "SISH615ADN-T1-GE3" SISH615ADN-T1-GE3-Footprint-1 128.962,42.99 r0 top
Q4 "SISH615ADN-T1-GE3" SISH615ADN-T1-GE3-Footprint-1 129.037,38.51 r180 top
Q5 "BSS138W-7-F" DIOD-SOT323-3_V 129.75,38.5 r90 bottom
R1 "DNP" RESC1005X40X25ML05T05 103.5,19.25 r0 top
R2_5V_REG_0 "1k" R0603B 103.5,42 r180 top (schematic designator R2)
R2_5V_REG_1 "1k" R0603B 103.5,21 r180 top (schematic designator R2)
R3_5V_REG_0 "DNP" R0603B 100.5,42 r180 top value=1k (schematic designator R3)
R3_5V_REG_1 "DNP" R0603B 100.5,21 r180 top value=1k (schematic designator R3)
R4_5V_REG_0 "100k" R0603B 59.5,45.5 r90 top (schematic designator R4)
R4_5V_REG_1 "100k" R0603B 59.5,31 r90 top (schematic designator R4)
R5_5V_REG_0 "100k" R0603B 59.5,42.75 r90 top value=24k (schematic designator R5)
R5_5V_REG_1 "100k" R0603B 59.5,28.25 r90 top value=24k (schematic designator R5)
R6 "10k" R0603B 64.5,9 r0 bottom
R7 "10k" R0603B 64.5,7.5 r0 bottom
R8 "0402 JUMPER" RESC1005X40X25ML05T05 52.25,70.5 r180 bottom
R9 "0402 JUMPER" RESC1005X40X25ML05T05 52.25,68 r180 bottom
R10 "402" R0603B 52.25,75.5 r180 bottom
R11 "0402 JUMPER" RESC1005X40X25ML05T05 52.25,69.25 r180 bottom
R12 "0402 JUMPER" RESC1005X40X25ML05T05 52.25,66.75 r180 bottom
R13 "100k" R0603B 46.75,81 r90 bottom
R14 "49.9" R0603B 55,73.75 r180 bottom
R15 "80.6k" R0603B 32.5,74.25 r90 bottom
R16 "DNP" R0603B 37,74.25 r90 bottom
R17 "20.5k" R0603B 32.5,71.25 r90 bottom
R18 "10k" R0603B 37,71.25 r90 bottom
R19 "120" R0603B 20,78.5 r180 bottom
R20 "5.1k" R0603B 57.5,70.5 r90 top
R21 "100k" R0603B 87,35.5 r0 bottom value=330
R22 "100k" R0603B 87,34 r0 bottom value=330
R23 "100k" R0603B 87,32.5 r0 bottom value=330
R24 "DNP" R0603B 98.75,36 r90 bottom value=330
R25 "100k" R0603B 133.25,46.25 r270 bottom
R26 "100k" R0603B 131,40.75 r0 bottom
R27 "100k" R0603B 27.25,74.25 r90 bottom
R28 "1k" R0603B 89.75,42 r180 bottom
R29 "24k" R0603B 27.25,71.25 r90 bottom
R30 "100k" R0603B 129.75,36 r0 bottom
R31 "100k" R0603B 89,50.75 r0 bottom
R32 "1k" R0603B 89,49.25 r180 bottom
R33 "60.4" R0603B 92,57.5 r180 bottom
R34 "60.4" R0603B 95,57.5 r180 bottom
R35 "56" R0603B 11.75,59 r180 bottom
R36 "24k" R0603B 28.75,74.25 r90 bottom
R37 "100k" R0603B 28.75,71.25 r90 bottom
R38 "DNP" RESC1005X40X25ML05T05 100.5,19.25 r180 top
R39 "1k" R0603B 8,16.5 r0 bottom
R40 "1k" R0603B 8,18 r0 bottom
R41 "1k" R0603B 128.5,40.75 r180 bottom
SW1 "KXT331LHS" FP-KXT331LHS-MFG 119,23.5 r90 top
U1_5V_REG_0 "LM2678S-5.0/NOPB" KTW0007B_L 100.5,51.4 r90 top (schematic designator U1)
U1_5V_REG_1 "LM2678S-5.0/NOPB" KTW0007B_L 100.5,30.4 r90 top (schematic designator U1)
U2_5V_REG_0 "ACS711KLCTR-12AB-T" FP-LC-8-IPC_C 63,45.5 r270 top (schematic designator U2)
U2_5V_REG_1 "ACS711KLCTR-12AB-T" FP-LC-8-IPC_C 63,31 r270 top (schematic designator U2)
U3 "MAX96724FGTN/V+" MAX96724FGTN_V+-Footprint-1 45,73.5 r270 bottom
U4 "LD1117S18TR" SOT-223_M 13,70.5 r270 bottom
U5 "LD1117S12TR" SOT-223_M 21.5,70.5 r270 bottom
U6 "MCP2518FDT-E/SL" FP-C04-065-SL-IPC_C 93.5,36 r180 bottom
U7 "ACS711KLCTR-25AB-T" FP-LC-8-IPC_A 131,33.25 r0 top
U8 "TCAN1146DYYRQ1" TCAN1146DYYRQ1-Footprint-1 93.5,45.5 r90 bottom
U10 "ADC088S022CIMT/NOPB" MTC16_L 11,55 r180 bottom
U11 "AP63203WU-7" FP-TSOT26-MFG 32.5,80 r180 bottom
XF1 "3557-2" KSTN-3557-2 131,57 r270 top
Y1 "ABM8G-25.000MHZ-18-D2Y-T" FP-ABM8G-MFG 53.5,79.75 r0 bottom
Y2 "ABM8G-20.000MHZ-18-D2Y-T" FP-ABM8G-MFG 101.75,36 r90 bottom

## Footprints (in the part's own frame and the unit in brackets; to place one, negate y for a bottom-side part, rotate by r counter-clockwise, add the part's x,y. Pads: shape width x height; smd on the part's side, far side on the other; paste and mask are expansions set on the pad)
61304021121 [mm] "Pin Header, pitch 2.54 mm, THT, Vertical, dual row, 40p"
  rrect50% 1.65x1.65 hole 1.1: 1(-24.13,-1.27)
  round 1.65 hole 1.1: 2(-24.13,1.27) 3(-21.59,-1.27) 4(-21.59,1.27) 5(-19.05,-1.27) 6(-19.05,1.27) 7(-16.51,-1.27) 8(-16.51,1.27) 9(-13.97,-1.27) 10(-13.97,1.27) 11(-11.43,-1.27) 12(-11.43,1.27) 13(-8.89,-1.27) 14(-8.89,1.27) 15(-6.35,-1.27) 16(-6.35,1.27) 17(-3.81,-1.27) 18(-3.81,1.27) 19(-1.27,-1.27) 20(-1.27,1.27) 21(1.27,-1.27) 22(1.27,1.27) 23(3.81,-1.27) 24(3.81,1.27) 25(6.35,-1.27) 26(6.35,1.27) 27(8.89,-1.27) 28(8.89,1.27) 29(11.43,-1.27) 30(11.43,1.27) 31(13.97,-1.27) 32(13.97,1.27) 33(16.51,-1.27) 34(16.51,1.27) 35(19.05,-1.27) 36(19.05,1.27) 37(21.59,-1.27) 38(21.59,1.27) 39(24.13,-1.27) 40(24.13,1.27)
  silkscreen extent -26.13,-2.62 25.55,2.62, body extent -25.4,-2.54 25.4,2.54, height 8.59
629104151021 [mm] "USB 2.0 Type A Horizontal SMT with pegs"
  rect 1.2x3.2 smd: 1(-3.5,6.65) 2(-1,6.65) 3(1,6.65) 4(3.5,6.65)
  round 1.2 hole 1.2 unplated: MH1(-2.5,2.95) MH2(2.5,2.95)
  oval 1.3x3.8 hole 0.7 slot 3 at 90 deg: Shell(-6.4,3.45) Shell(6.4,3.45)
  silkscreen extent -7.25,-7 7.25,7, body extent -7.25,-7 7.25,8.2, height 7.34
DIOD-SOT323-3_V [mm] "SOT323, 3-Leads, Body 2.2x1.35mm, Pitch 0.65mm"
  rect 0.9x0.7 smd: 1(-0.95,0.65) 2(-0.95,-0.65) 3(0.95,0)
  silkscreen extent -1.07,-1.1 0.67,1.68, body extent -1.1,-1.1 1.1,1.1, height 1.07
FA1-NDRP-PCB-8-Footprint-1 [mil]
  round 75 hole 46: 1(0,0)
  round 100 hole 67: 2(-100,-100) 2(-100,100) 2(100,-100) 2(100,100)
  silkscreen extent -175,-175 175,250, body extent -157,-183 157,758, height 421
FP-0ZCK0010FF2G-MFG [mm]
  rect 1x1.5 smd paste+0 mask+0: 1(-1.1,0) 2(1.1,0)
  silkscreen extent -0.23,-0.75 0.23,0.75, body extent -1.7,-0.85 1.7,0.85, height 0.25
FP-1-1734248-5-MFG [mm]
  rect 0.6x1.65 smd paste+0 mask+0: 1(7,-1.75) 2(6,-1.75) 3(5,-1.75) 4(4,-1.75) 5(3,-1.75) 6(2,-1.75) 7(1,-1.75) 8(0,-1.75) 9(-1,-1.75) 10(-2,-1.75) 11(-3,-1.75) 12(-4,-1.75) 13(-5,-1.75) 14(-6,-1.75) 15(-7,-1.75)
  rect 0.6x1.85 smd paste+0 mask+0: 1(7,2) 2(6,2) 3(5,2) 4(4,2) 5(3,2) 6(2,2) 7(1,2) 8(0,2) 9(-1,2) 10(-2,2) 11(-3,2) 12(-4,2) 13(-5,2) 14(-6,2) 15(-7,2)
  silkscreen extent -11.55,-2.07 11.55,3.6, body extent -11.65,-2.67 11.65,3.02, height 0.25
FP-0402-L_1_0_0_05-W_0_5-IPC_A [mm]
  rect 0.715x0.672 smd paste+0 mask+0: 1(-0.479,0) 2(0.479,0)
  silkscreen extent -0.84,-0.74 0.84,0.74, body extent -1.04,-0.54 1.04,0.54, height 0.25
FP-1210POC-MFG [mm]
  rect 0.65x2.65 smd paste+0 mask+0: 1(-1.27,0) 2(1.27,0)
  silkscreen extent -0.57,-1.34 0.57,1.34, body extent -1.75,-1.44 1.75,1.44, height 0.25
FP-2920L050DR-MFG [mm]
  rect 2x5.3 smd paste+0 mask+0: 1(-3.3,0) 2(3.3,0)
  silkscreen extent -1.92,-2.72 1.92,2.72, body extent -4.4,-2.82 4.4,2.82, height 0.25
FP-776087-1-MFG [mm]
  rect 2.65x2.65 hole 1.75 paste-2539.97 mask+0: 1(-14,16.9)
  round 2.65 hole 1.75 paste-2539.97 mask+0: 2(-10,16.9) 3(-6,16.9) 4(-2,16.9) 5(2,16.9) 6(6,16.9) 7(10,16.9) 8(14,16.9) 9(-12,12.9) 10(-8,12.9) 11(-4,12.9) 12(0,12.9) 13(4,12.9) 14(8,12.9) 15(12,12.9) 16(-14,8.9) 17(-10,8.9) 18(-6,8.9) 19(-2,8.9) 20(2,8.9) 21(6,8.9) 22(10,8.9) 23(14,8.9)
  round 2.85 hole 2.85 unplated paste-2539.97 mask+0: ""(-20.5,12.4) ""(20.5,12.4)
  silkscreen extent -31.22,4 30.5,19.15, body extent -30.6,-19.25 30.6,19.25, height 0.25
FP-ABM8G-MFG [mm]
  rect 1.4x1.2 smd paste+0 mask+0: 1(-1.1,-0.85) 2(1.1,-0.85) 3(1.1,0.85) 4(-1.1,0.85)
  silkscreen extent -2.47,-1.83 1.6,1.83, body extent -1.6,-1.25 1.6,1.25, height 1
FP-B2B-XH-A_LF_SN-MFG [mm]
  rect 1.55x1.55 hole 1 paste-2539.97 mask+0: 1(-1.25,0.525)
  round 1.55 hole 1 paste-2539.97 mask+0: 2(1.25,0.525)
  silkscreen extent -4.5,-2.88 3.7,2.88, body extent -3.8,-2.98 3.8,2.98, height 0.25
FP-B4B-XH-A_LF_SN-MFG [mm]
  rect 1.4x1.4 hole 0.9 paste-2539.97 mask+0: 1(3.75,-0.525)
  round 1.4 hole 0.9 paste-2539.97 mask+0: 2(1.25,-0.525) 3(-1.25,-0.525) 4(-3.75,-0.525)
  silkscreen extent -6.2,-2.88 6.87,2.88, body extent -6.3,-2.98 6.3,2.98, height 0.25
FP-B8B-XH-A_LF_SN-MFG [mm]
  rect 1.4x1.4 hole 0.9 paste-2539.97 mask+0: 1(8.75,-0.525)
  round 1.4 hole 0.9 paste-2539.97 mask+0: 2(6.25,-0.525) 3(3.75,-0.525) 4(1.25,-0.525) 5(-1.25,-0.525) 6(-3.75,-0.525) 7(-6.25,-0.525) 8(-8.75,-0.525)
  silkscreen extent -11.2,-2.88 11.92,2.88, body extent -11.3,-2.98 11.3,2.98, height 0.25
FP-C04-065-SL-IPC_C [mm]
  rect 1.874x0.542 smd paste+0 mask+0: 1(-2.316,3.81)
  rrect100% 1.874x0.542 smd paste+0 mask+0: 2(-2.316,2.54) 3(-2.316,1.27) 4(-2.316,0) 5(-2.316,-1.27) 6(-2.316,-2.54) 7(-2.316,-3.81) 8(2.316,-3.81) 9(2.316,-2.54) 10(2.316,-1.27) 11(2.316,0) 12(2.316,1.27) 13(2.316,2.54) 14(2.316,3.81)
  silkscreen extent -3.88,-4.33 0.88,4.33, body extent -3,-4.33 3,4.33, height 1.75
FP-DQA0010A-MFG [mm]
  rrect50% 0.565x0.2 smd paste+0 mask+0: 1(-0.417,1) 2(-0.417,0.5) 4(-0.417,-0.5) 5(-0.417,-1) 6(0.417,-1) 7(0.417,-0.5) 9(0.417,0.5) 10(0.417,1)
  rrect25% 0.565x0.4 smd paste-1000 mask+0: 3(-0.417,0) 8(0.417,0)
  silkscreen extent -1.38,-1.48 0.55,1.48, body extent -0.5,-1.25 0.5,1.25, height 0.55
FP-GRM21B-0_2-e0_2_0_7-IPC_B [mm]
  rect 1.255x1.456 smd paste+0 mask+0: 1(-0.826,0) 2(0.826,0)
  silkscreen extent -1.45,-1.13 1.45,1.13, body extent -1.7,-0.98 1.7,0.98, height 0.25
FP-GRM188-0_1-e0_2_0_55-IPC_A [mm]
  rect 1.208x1.012 smd paste+0 mask+0: 1(-0.802,0) 2(0.802,0)
  silkscreen extent -1.41,-0.91 1.41,0.91, body extent -0.8,-0.4 0.8,0.4, height 0.9
FP-IHLP-4040DZ-FP_3_124x3-MFG [mm]
  rect 3.124x3.251 smd paste+0 mask+0: 1(-4.47,0) 2(4.47,0)
  silkscreen extent -5.14,-5.14 5.14,5.14, body extent -6.13,-5.24 6.13,5.24, height 0.25
FP-KXT331LHS-MFG [mm]
  rect 0.55x1.5 smd paste+0 mask+0: 1(-1.625,0) 2(1.625,0)
  silkscreen extent -1.65,-1.15 1.65,1.15, body extent -2,-1.25 2,1.25, height 0.25
FP-LC-8-IPC_A [mm]
  rect 2.474x0.622 smd paste+0 mask+0: 1(-2.416,1.905)
  rrect100% 2.474x0.622 smd paste+0 mask+0: 2(-2.416,0.635) 3(-2.416,-0.635) 4(-2.416,-1.905) 5(2.416,-1.905) 6(2.416,-0.635) 7(2.416,0.635) 8(2.416,1.905)
  silkscreen extent -4.37,-2.45 0.68,2.45, body extent -4.15,-2.95 4.15,2.95, height 0.25
FP-LC-8-IPC_C [mm]
  rect 1.874x0.542 smd paste+0 mask+0: 1(-2.316,1.905)
  rrect100% 1.874x0.542 smd paste+0 mask+0: 2(-2.316,0.635) 3(-2.316,-0.635) 4(-2.316,-1.905) 5(2.316,-1.905) 6(2.316,-0.635) 7(2.316,0.635) 8(2.316,1.905)
  silkscreen extent -3.97,-2.45 0.88,2.45, body extent -3.35,-2.55 3.35,2.55, height 0.25
FP-NR5040-H_4_1-MFG [mm]
  rect 1.5x4 smd paste+0 mask+0: 1(-1.8,0) 2(1.8,0)
  silkscreen extent -2.55,-2.55 2.55,2.55, body extent -2.45,-2.45 2.45,2.45, height 4.1
FP-PFL1609-MFG [mm]
  rect 0.64x1.02 smd paste+0 mask+0: 1(-0.635,0) 2(0.635,0)
  silkscreen extent -0.9,-0.89 0.9,0.89, body extent -0.9,-0.54 0.9,0.54, height 0.95
FP-SMC-MFG [mm]
  rect 2.5x3.3 smd paste+0 mask+0: 1(-3.45,0) 2(3.45,0)
  silkscreen extent -4.25,-3.11 3.55,3.11, body extent -4.8,-3.21 4.8,3.21, height 0.25
FP-SOD-123-IPC_A [mm]
  rect 1.308x0.762 smd paste+0 mask+0: 1(-1.825,0)
  rrect100% 1.308x0.762 smd paste+0 mask+0: 2(1.825,0)
  silkscreen extent -2.39,-0.8 1.35,1.01, body extent -1.85,-0.8 1.85,0.8, height 1.35
FP-SOT323-3L-MFG [mm]
  rect 0.7x0.42 smd paste+0 mask+0: 1(-1,0.65) 2(-1,-0.65) 3(1,0)
  silkscreen extent -0.67,-1.1 0.67,1.1, body extent -1.05,-1 1.05,1, height 1.1
FP-SRF4532-MFG [mm]
  round 0.99 smd paste+0 mask+0: 1(-2.05,-1.25) 2(2.05,-1.25)
  round 0.97 smd paste+0 mask+0: 3(2.05,1.125) 4(-2.05,1.125)
  Top Layer region: -2.6,-1.8 -2.6,-0.45 -1.9,-0.45 -1.5,-0.95 -1.5,-1.8
  Top Layer region: 1.5,-1.8 1.5,-0.95 1.9,-0.45 2.6,-0.45 2.6,-1.8
  Top Layer region: 1.5,1.8 2.6,1.8 2.6,0.45 1.9,0.45 1.5,0.95
  Top Layer region: -2.6,0.45 -2.6,1.8 -1.5,1.8 -1.5,0.95 -1.9,0.45
  silkscreen extent -2.17,-2.47 1.12,1.7, body extent -2.25,-1.6 2.25,1.6, height 3
FP-TPSE-MFG [mm]
  rect 2x3 smd paste+0 mask+0: 1(-3,0) 2(3,0)
  silkscreen extent -3.75,-2.25 4.9,2.25, body extent -4.1,-2.35 4.1,2.35, height 0.25
FP-TSOT26-MFG [mm]
  rect 1x0.7 smd paste+0 mask+0: 1(-1.099,0.95) 2(-1.099,0) 3(-1.099,-0.95) 4(1.099,-0.95) 5(1.099,0) 6(1.099,0.95)
  silkscreen extent -2.33,-1.5 0.22,1.5, body extent -1.4,-1.45 1.4,1.45, height 1
KSTN-3557-2 [mm] "Fuse Holder, PCB Mount, Thru-Hole, Body 19.8x6.8mm, Height 7.4mm"
  round 2.15 hole 1.8: 1(-6.75,1.7) 2(-6.75,-1.7) 3(6.75,1.7) 4(6.75,-1.7)
  silkscreen extent -9.9,-3.4 9.9,4.13, body extent -9.91,-3.37 9.91,3.37, height 7.74
KTW0007B_L [mm] "DPAK, 7-Leads, Body 9.4x10.4mm, Pitch 1.27mm, IPC High Density"
  rrect11% 3.2x0.9 smd: 1(-6.25,3.81) 2(-6.25,2.54) 3(-6.25,1.27) 4(-6.25,0) 5(-6.25,-1.27) 6(-6.25,-2.54) 7(-6.25,-3.81)
  rrect1% 8.5x10.45 smd: 8(3.6,0)
  silkscreen extent -6.37,-5.2 -1.05,5.2, body extent -3.3,-5.2 6.1,5.2, height 4.65
MAX96724FGTN_V+-Footprint-1 [mm]
  oval 0.95x0.25 smd: 1(-3.875,3.25) 2(-3.875,2.75) 3(-3.875,2.25) 4(-3.875,1.75) 5(-3.875,1.25) 6(-3.875,0.75) 7(-3.875,0.25) 8(-3.875,-0.25) 9(-3.875,-0.75) 10(-3.875,-1.25) 11(-3.875,-1.75) 12(-3.875,-2.25) 13(-3.875,-2.75) 14(-3.875,-3.25) 29(3.875,-3.25) 30(3.875,-2.75) 31(3.875,-2.25) 32(3.875,-1.75) 33(3.875,-1.25) 34(3.875,-0.75) 35(3.875,-0.25) 36(3.875,0.25) 37(3.875,0.75) 38(3.875,1.25) 39(3.875,1.75) 40(3.875,2.25) 41(3.875,2.75) 42(3.875,3.25)
  oval 0.25x0.95 smd: 15(-3.25,-3.875) 16(-2.75,-3.875) 17(-2.25,-3.875) 18(-1.75,-3.875) 19(-1.25,-3.875) 20(-0.75,-3.875) 21(-0.25,-3.875) 22(0.25,-3.875) 23(0.75,-3.875) 24(1.25,-3.875) 25(1.75,-3.875) 26(2.25,-3.875) 27(2.75,-3.875) 28(3.25,-3.875) 43(3.25,3.875) 44(2.75,3.875) 45(2.25,3.875) 46(1.75,3.875) 47(1.25,3.875) 48(0.75,3.875) 49(0.25,3.875) 50(-0.25,3.875) 51(-0.75,3.875) 52(-1.25,3.875) 53(-1.75,3.875) 54(-2.25,3.875) 55(-2.75,3.875) 56(-3.25,3.875)
  rect 4.7x4.7 smd: 57(0,0)
  silkscreen extent -4.97,-4.2 4.2,4.2, body extent -4.05,-4.05 4.05,4.05, height 0.8
MTC16_L [mm] "TSOP, 16-Leads, Body 5x4.4mm, Pitch 0.65mm, IPC High Density"
  oval 1.4x0.35 smd: 1(-2.8,2.275) 2(-2.8,1.625) 3(-2.8,0.975) 4(-2.8,0.325) 5(-2.8,-0.325) 6(-2.8,-0.975) 7(-2.8,-1.625) 8(-2.8,-2.275) 9(2.8,-2.275) 10(2.8,-1.625) 11(2.8,-0.975) 12(2.8,-0.325) 13(2.8,0.325) 14(2.8,0.975) 15(2.8,1.625) 16(2.8,2.275)
  silkscreen extent -2.93,-2.55 1.7,3.12, body extent -2.25,-2.55 2.25,2.55, height 1.1
ONSC-SOD-123-2-425-04_V [mm] "SOD, 2-Leads, Body 2.69x1.6mm"
  rect 0.91x1.22 smd: 1(-1.635,0) 2(1.635,0)
  silkscreen extent -1.76,-0.8 0.78,1.29, body extent -1.35,-0.8 1.35,0.8, height 1.35
ONSC-SOD-523-2-502-01_V [mm] "SOD, 2-Leads, Body 1.2x0.8mm"
  rect 0.48x0.4 smd: 1(-0.66,0) 2(0.66,0)
  silkscreen extent -0.75,-0.4 0.07,0.65, body extent -0.6,-0.4 0.6,0.4, height 0.7
R0603B [mm] "Chip Resistor, 0603, 2-Leads, Body 1.58x0.85mm, IPC Medium Density"
  rrect25% 0.8x0.95 smd: 1(-0.65,0) 2(0.65,0)
  silkscreen extent -0.2,-0.7 0.2,0.7, body extent -0.82,-0.48 0.82,0.48, height 0.5
RESC1005X40X25ML05T05 [mm] "Chip Resistor, 2-Leads, Body 1.00x0.50mm, IPC Low Density"
  rect 0.65x0.65 smd: 1(-0.5,0) 2(0.5,0)
  body extent -0.53,-0.27 0.53,0.28, height 0.4
SISH615ADN-T1-GE3-Footprint-1 [mm]
  rect 0.35x0.5 smd paste+0 mask+0: 1(-0.937,-1.4) 2(-0.288,-1.4) 3(0.363,-1.4) 4(1.012,-1.4)
  round 0.025 smd mask+0: 5-6-7-8(0.038,0.51)
  Top Layer region: -1.187,-0.63 -1.187,-0.215 -1.568,-0.215 -1.568,0.215 -1.187,0.215 -1.187,1.35 -1.137,1.35 -1.137,1.65 -0.737,1.65 -0.737,1.35 -0.487,1.35 -0.487,1.65 -0.088,1.65 -0.088,1.35 0.163,1.35 0.163,1.65 0.563,1.65 0.563,1.35 0.813,1.35 0.813,1.65 1.212,1.65 1.212,1.35 1.262,1.35 1.262,0.215 1.643,0.215 1.643,-0.215 1.262,-0.215 1.262,-0.63
  silkscreen extent -1.51,-2.37 1.59,-1.01, body extent -1.67,-1.75 1.74,1.75, height 0.25
SOT-223_M [mm] "SOT223, 4-Leads, Body 6.5x3.5mm, Pitch 2.3mm, Lead Span 7mm, IPC Low Density"
  rect 2.7x1 smd: 1(-2.95,2.3) 2(-2.95,0) 3(-2.95,-2.3)
  rect 2.7x3.3 smd: 4(2.95,0)
  silkscreen extent -3.07,-3.35 1.3,3.47, body extent -1.85,-3.35 1.85,3.35, height 1.8
TCAN1146DYYRQ1-Footprint-1 [mil]
  rect 38.5x12 smd paste+0 mask+0: 1(-60.75,59.07) 2(-60.75,39.38) 3(-60.75,19.69) 4(-60.75,0) 5(-60.75,-19.69) 6(-60.75,-39.38) 7(-60.75,-59.07) 8(60.75,-59.07) 9(60.75,-39.38) 10(60.75,-19.69) 11(60.75,0) 12(60.75,19.69) 13(60.75,39.38) 14(60.75,59.07)
  silkscreen extent -47,-90 100,90, body extent -66,-84 66,84, height 43
WE-TPC_1038 [mm] "Power Inductor, SMD, 2-Leads, body 10x10mm"
  rect 4.6x1.8 smd: 1(0,4.5) 2(0,-4.5)
  silkscreen extent -5,-4.5 5,6.02, body extent -5,-5 5,5, height 3.8

## Part data
C1_5V_REG_0 C1_5V_REG_1 C10_5V_REG_0 C10_5V_REG_1 C11 C12 C13 C14 C15 C16 C17 C18 C19 C20 C21 C23 C25 C26 C27 C28 C29 C30 C31 C32 C33 C34 C35 C36 C37 C38 C39 C40 C42 C43 C44 C45 C46 C47 C48 C49 C50 C51 C54 C55 C56 C57 C58: library part CMP-001-00058-1, "LARGE PADS, 0402 CAP, CHANGE COMMENT TO MATCH REAL P/N", Capacitor Type=Ceramic, Case/Package=0402, Max Operating Temperature=85°C, Min Operating Temperature=-55°C, Mounting Technology="Surface Mount", Pins=2, RoHS Compliant=Yes
C2_5V_REG_0 C2_5V_REG_1 C3_5V_REG_0 C3_5V_REG_1 C4_5V_REG_0 C4_5V_REG_1 C5_5V_REG_0 C5_5V_REG_1 C6_5V_REG_0 C6_5V_REG_1 C7_5V_REG_0 C7_5V_REG_1 C8_5V_REG_0 C8_5V_REG_1 C9_5V_REG_0 C9_5V_REG_1 C62_5V_REG_0 C62_5V_REG_1 C63_5V_REG_0 C63_5V_REG_1: library part CMP-04424-000178-1, "CAP TANT 68UF 10% 25V 2917", Capacitance=68uF, Case Code (Imperial)=2917, Case Code (Metric)=7343, Dielectric Material=Tantalum, ESR (Equivalent Series Resistance)=125mR, Leakage Current=17uA, Max Operating Temperature=125°C, Min Operating Temperature=-55°C, Package Quantity=1, Ripple Current=460uA, Tolerance=10%, Voltage=25V, Case/Package=2917, Depth=4.3mm, Dissipation Factor=6%, Features="General Purpose", Height=4.1mm, Height - Seated (Max)=0.169inch, Lead Free="Lead Free", Length=7.3mm, Mount="Surface Mount", Number of Pins=2, Packaging="Tape and Reel", Polarity=Polar, Radiation Hardening=No, REACH SVHC="No SVHC", RoHS Compliant=Yes, Series=TPS, Termination=SMD/SMT, Voltage Rating=25V, Voltage Rating (DC)=25V, Width=4.3mm
C22 C24: library part CMP-2006-02792-2, "Chip Multilayer Ceramic Capacitors for General Purpose, 0603, 10uF, X5R, 15%, 20%, 6.3V", Capacitance=10uF, Case Code (Imperial)=0603, Case Code (Metric)=1608, Dielectric=X5R, Max Operating Temperature=85°C, Min Operating Temperature=-55°C, Package Quantity=4000, Tolerance=20%, Voltage=6.3V, Case/Package=0603, Depth=0.8mm, Height=0.8mm, Lead Free="Lead Free", Length=1.6mm, Material=Ceramic, Mount="Surface Mount", Packaging="Tape and Reel", Radiation Hardening=No, REACH SVHC="No SVHC", Termination=SMD/SMT, Thickness=0.035inch, Voltage Rating=6.3V, Voltage Rating (DC)=6.3V, Width=0.031inch
C41 C59 C60 C61: library part CMP-2007-03222-3, "Chip Multilayer Ceramic Capacitors for General Purpose, 0805, 22uF, X5R, 15%, 20%, 25V", Capacitance=22uF, Case Code (Imperial)=0805, Case Code (Metric)=2012, Dielectric=X5R, Max Operating Temperature=85°C, Min Operating Temperature=-55°C, Package Quantity=3000, Resistor Type=Ceramic, Tolerance=20%, Voltage=25V, Case/Package=0805, Depth=1.25mm, Height=1.25mm, Lead Free="Lead Free", Length=2mm, Material=Ceramic, Mount="Surface Mount", Packaging="Tape and Reel", REACH SVHC="No SVHC", Termination=SMD/SMT, Thickness=0.057inch, Voltage Rating=25V, Voltage Rating (DC)=25V, Weight=0.000335oz, Width=1.25mm
D1_5V_REG_0 D1_5V_REG_1: library part CMP-2000-05097-3, "DIODE SCHOTTKY 40V 5A SMC", Capacitance=300pF, Forward Current=5A, Manufacturer="Diodes Inc.", Max Junction Temp=+150°C, Max Repetitive Reverse Voltage=40V, Max Surge Forward Current=100A, Package=SMC, Peak Reverse Current=0.5mA, Temperature="-55°C to +150°C", Temperature Range Low=-55°C, Automotive=No, Automotive Grade=NA, Category=Diode, ComponentLink2Description=Datasheet, ComponentLink2URL=https://www.diodes.com/assets/Datasheets/ds13012.pdf, Device Class L1="Discrete Semiconductors", Device Class L2=Diodes, Device Class L3="Schottky Diodes", Digikey Description="DIODE SCHOTTKY 40V 5A SMC", Footprint Url=https://www.diodes.com/assets/Package-Files/SMC.pdf, Height=2.5mm, Lead Free=Yes, Manufacturer Part Number=B540C-13-F, Mouser Description="Diode: Schottky rectifying; SMD; 40V; 5A; SMC; Package: reel, tape", Octopart=https://octopart.com/b540c-13-f-diodes+inc.-325873, Reverse Voltage=40V, RoHS=TRUE, Standoff Height=0.1mm, Temperature Range High=+150°C
D2: library part CMP-04989-000002-1, "4-CHANNEL LOW-CAPACITANCE SURGE", Ambient Temperature Range High=+125°C, Ambient Temperature Range Low=-40°C, Breakdown Voltage=5.5V, Capacitance=0.55pF, Clamping Voltage=11.5V, Manufacturer="Texas Instruments", Package=DQA0010A, Peak Pulse Current=5.5A, Peak Pulse Power=50W, Reverse Standoff Voltage=3.6V, Temperature="-40°C to +125°C", Automotive=No, Category=Diode, ComponentLink2Description=Datasheet, ComponentLink2URL=http://www.ti.com/lit/ds/symlink/esd204.pdf, Device Class L1="Circuit Protection", Device Class L2="TVS Diodes", Device Class L3=unset, Digikey Description="4-CHANNEL LOW-CAPACITANCE SURGE", Direction=Bidirectional, Height=0.55mm, Lead Free=Yes, Manufacturer Part Number=ESD204DQAR, Mouser Description="4-Channel Low-Capacitance Surge and ESD Protection Diode 10-USON -40 to 125", Number Of Channels=4, Octopart=https://octopart.com/esd204dqar-texas+instruments-89917476, RoHS=TRUE, Standoff Height=0mm, Temperature Range High=+125°C, Temperature Range Low=-40°C
D3: library part CMP-1060-00565-1, "Zener Voltage Regulator, 500 mW, 2-Pin SOD-123, Pb-Free, Tape and Reel", Manufacturer="On Semiconductor", ComponentLink1Description="Manufacturer URL", ComponentLink1URL=http://www.onsemi.com/, ComponentLink2Description=Datasheet, ComponentLink2URL=http://www.onsemi.com/pub_link/Collateral/MMSZ5221BT1-D.PDF, ComponentLink3Description="Package Specification", ComponentLink3URL=http://www.onsemi.com/pub_link/Collateral/425-04.PDF, DatasheetVersion="Rev. 12", Mounting Technology="Surface Mount", P Max (W)=0.5, PackageDescription="2-Pin SOD, Body 1.6 x 2.69 mm", PackageReference=SOD-123-2-425-04, PackageVersion="Rev. G, 10/2009", Packing="Tape and Reel", PartNumber=MMSZ5242BT1G, RoHS=Pb-Free, VZ Typ (V)=12
D4: library part CMP-2000-04993-2, "DIODE GEN PURP 100V 150MA SOD123", Average Rectified Current=150mA, Capacitance=4pF, Forward Voltage=1V, Max Forward Surge Current (Ifsm)=1A, Max Operating Temperature=150°C, Max Repetitive Reverse Voltage (Vrrm)=100V, Max Reverse Leakage Current=5uA, Max Surge Current=2A, Min Operating Temperature=-65°C, Package Quantity=3000, Power Dissipation=400mW, Current Rating=150mA, Element Configuration=Single, Forward Current=150mA, Height=1.2mm, Lead Free="Lead Free", Length=2.85mm, Max Reverse Voltage (DC)=100V, Mount="Surface Mount", Number of Pins=2, Output Current=150mA, Packaging="Tape and Reel", Peak Non-Repetitive Surge Current=2A, Polarity=Standard, Radiation Hardening=No, Recovery Time=4ns, Reverse Recovery Time=4ns, Voltage Rating (DC)=100V, Width=1.8mm
D5: library part CMP-12225-000055-1, "TVS DIODE 26.5V 44V SOT323-3", Breakdown Voltage=28.5V, Capacitance=3pF, Clamping Voltage=44V, Manufacturer=STMicroelectronics, Max Junction Temp=+175°C, Package=SOT323-3L, Peak Pulse Current=3A, Peak Pulse Power=170W, Reverse Standoff Voltage=26.5V, Temperature="-55°C to +175°C", Temperature Range Low=-55°C, Automotive=Yes, Automotive Grade="Grade 0", Category=Diode, ComponentLink2Description=Datasheet, ComponentLink2URL=https://www.st.com/resource/en/datasheet/esdcan02-2bwy.pdf, Device Class L1="Circuit Protection", Device Class L2="TVS Diodes", Device Class L3=unset, Digikey Description="TVS DIODE 26.5V 44V SOT323-3", Direction=Bidirectional, Height=1.1mm, Ipc Land Pattern Name=SOT65P210X95-3, Lead Free=Yes, Manufacturer Part Number=ESDCAN02-2BWY, Mouser Description="TVS Diodes / ESD Suppressors Automotive dual-line Transil, Transient voltage suppressor (TVS) for CAN bus", Number Of Channels=2, Octopart=https://octopart.com/esdcan02-2bwy-stmicroelectronics-58631133, RoHS=TRUE, Standoff Height=0mm, Temperature Range High=+175°C
D6 D7: library part CMP-1060-00750-1, "Zener Voltage Regulator, 500 mW, 2-Pin SOD-523, Pb-Free, Tape and Reel", Manufacturer="On Semiconductor", ComponentLink1Description="Manufacturer URL", ComponentLink1URL=http://www.onsemi.com/, ComponentLink2Description=Datasheet, ComponentLink2URL=http://www.onsemi.cn/pub_link/Collateral/MM5Z2V4T1-D.PDF, ComponentLink3Description="Package Specification", ComponentLink3URL=http://www.onsemi.com/pub_link/Collateral/502-01.PDF, DatasheetVersion="Rev. 10", Mounting Technology="Surface Mount", P Max (W)=0.5, PackageDescription="2-Pin SOD, Body 1.2 x 0.8 mm", PackageReference=SOD-523-2-502-01, PackageVersion="Rev. E, 09/2010", Packing="Tape and Reel", PartNumber=MM5Z3V3T1G, RoHS=Pb-Free, VZ Typ (V)=3.3
F1 F2 F3 F4: library part CMP-08606-000071-1, "PTC RESET FUSE 60V 500MA 2920", Case Code (Imperial)=2920, Case Code (Metric)=7351, Current Rating=10A, Hold Current=500mA, Max Operating Temperature=85°C, Max Voltage Rating (DC)=60V, Min Operating Temperature=-40°C, Package Quantity=1500, Power Dissipation=1.5W, Resistance=1.4R, Trip Current=1A, Approvals=cULus, Case/Package=2920, Height=1.25mm, Lead Free="Lead Free", Length=7.98mm, Max Current Rating=10A, Operating Supply Voltage=60V, Packaging="Tape and Reel", REACH SVHC="No SVHC", RoHS Compliant=Yes, Series=2920L, Terminal Material=Copper, Termination=SMD/SMT, Time to Trip=4s, Voltage Rating=60V, Voltage Rating (DC)=60V, Width=5.44mm, Working Voltage=60V
F5: library part CMP-16043-000017-1, "PTC RESET FUSE 15V 100MA 0805", Case Code (Imperial)=0805, Case Code (Metric)=2012, Hold Current=100mA, Max Current Rating=100A, Package Quantity=1, Trip Current=300mA, Case/Package=0805, Lead Free="Lead Free", Packaging="Tape and Reel", RoHS Compliant=Yes, Time to Trip=1.5s
J1: library part CMP-002-00054-1, "RF F Connector, Male, Board Mount, Solder Terminal, Plug", Connector Type="RF F CONNECTOR", Mounting Technology=Board, RoHS Compliant=Yes
J2: library part CMP-03368-000001-1, "CONN FPC VERT 15POS 1.00MM SMD", Current Rating=1A, Manufacturer=TE, Package=0, Temperature="-20°C to +85°C", Temperature Range High=+85°C, Temperature Range Low=-20°C, Voltage Rating=125V, Automotive=No, Category=Conn, ComponentLink2Description=Datasheet, ComponentLink2URL=https://www.te.com/commerce/DocumentDelivery/DDEController?Action=showdoc&DocId=Customer+Drawing%7F1734248%7FE1%7Fpdf%7FEnglish%7FENG_CD_1734248_E1__.pdf%7F1-1734248-5, Conn Gender=Female, Conn Orientation=Vertical, Contact Material=Gold,Nickel, Device Class L1=Connectors, Device Class L2="FFC / FPC", Device Class L3=unset, Digikey Description="CONN FPC VERT 15POS 1.00MM SMD", Height=8mm, Is Female=yes, Lead Free=Yes, Manufacturer Part Number=1-1734248-5, Mounting Type="Surface Mount", Mouser Description="FFC & FPC Connectors 15P 1.0 FPC, Zip V/T SMT", Number of Contacts=15, Octopart=https://octopart.com/1-1734248-5-te+connectivity-40620898, Pitch=1mm, RoHS=TRUE
J3: library part CMP-03369-000157-2, "CONN HEADER R/A 23POS 4MM", Color=Black, Current Rating=17A, Flammability Rating="UL94 V-0", Max Operating Temperature=221°C, Max Voltage Rating (AC)=250V, Min Operating Temperature=-40°C, Package Quantity=1, Circuit Application=Power, Connector System=Wire-to-Device, Connector Type=Header, Contact Finish - Mating=TIN, Contact Material=Brass, Contact Plating=Tin, Contact Shape=Circular, Contact Type="Male Pin", Depth=37.9mm, ELV=Compliant, Fastening Type=Ramp, Gender=Male, Housing Color=Black, Housing Material=Polybutylene, Insulation Color=Black, Insulation Material=PBT, Lead Free="Lead Free", Length=60.8mm, Mount="Through Hole", Number of Contacts=23, Number of Ports=1, Number of Positions=23, Number of Rows=3, Number of Signal Positions=23, Number of Terminals/Pins=23, Orientation="Right Angle", Packaging=Bulk, PCB Mount Alignment="Yes (With)", PCB Mount Retention=With, PCB Thickness=0.062inch, Pitch=0.157inch, Primary Type=Rectangular, Radiation Hardening=No, RoHS Compliant=Yes, Row Spacing=0.157inch, Sealable="Yes (With)", Series=Ampseal, Shielding=Unshielded, Tab Thickness=1.3mm, Termination=Solder, Voltage Rating (AC)=250V, Width=37.9mm
J4 J5: library part CMP-17438-000015-1, "CONN HEADER VERT 8POS 2.5MM", Color=Natural, Contact Resistance=20mR, Current Rating=3A, Housing Color=White, Insulation Resistance=1GR, Max Operating Temperature=85°C, Max Voltage Rating (AC)=250V, Min Operating Temperature=-25°C, Connector Type="Male Pin", Contact Material=Brass, Contact Plating=Tin, Contact Type="Male Pin", Depth=5.75mm, Fastening Type=Detent, Housing Material=Polyamide, Lead Free="Lead Free", Lead Pitch=2.5mm, Length=22.4mm, Max Current Rating=3A, Mount="Through Hole", Number of Contacts=8, Number of Positions=8, Number of Rows=1, Orientation=Straight, Packaging=Bulk, Pitch=2.5mm, REACH SVHC="No SVHC", Series=XH, Termination=Press-Fit, Voltage Rating=250V, Voltage Rating (AC)=250V, Wire/Cable Gauge=22AWG
J6: library part CMP-2000-05888-3, "CONN HEADER VERT 2POS 2.5MM", Color=Natural, Contact Resistance=20mR, Current Rating=3A, Housing Color=White, Insulation Resistance=1GR, Max Operating Temperature=85°C, Max Voltage Rating (AC)=250V, Min Operating Temperature=-25°C, Connector Type="Male Pin", Contact Material=Brass, Contact Plating=Tin, Contact Type="Male Pin", Depth=5.75mm, Fastening Type=Detent, Housing Material=Polyamide, Lead Free="Lead Free", Lead Pitch=2.5mm, Length=7.4mm, Max Current Rating=3A, Max Voltage Rating (DC)=250V, Mount="Through Hole", Number of Contacts=2, Number of Positions=2, Number of Rows=1, Orientation=Straight, Packaging=Bulk, Pitch=2.5mm, REACH SVHC="No SVHC", Series=XH, Termination=Solder, Voltage Rating=250V, Voltage Rating (AC)=250V, Wire/Cable Gauge=22AWG
J7: library part CMP-17439-000250-1, "CONN HEADER VERT 4POS 2.5MM", Color=Natural, Contact Resistance=20mR, Current Rating=3A, Flammability Rating="UL94 V-0", Housing Color=White, Insulation Resistance=1GR, Max Operating Temperature=85°C, Max Voltage Rating (AC)=250V, Min Operating Temperature=-25°C, Package Quantity=500, Connector Type=Header, Contact Finish - Mating=TIN, Contact Material=Brass, Contact Plating=Tin, Contact Shape=Square, Contact Type="Male Pin", Depth=5.75mm, Fastening Type=Detent, Gender=Male, Housing Material=Polyamide, Insulation Color=Natural, Insulation Material=Nylon, Lead Free="Lead Free", Lead Pitch=2.5mm, Length=12.4mm, Mated Stacking Heights=9.8mm, Material=Polyamide, Max Current Rating=3A, Max Voltage Rating (DC)=250V, Mount="Through Hole", Number of Contacts=4, Number of Positions=4, Number of Rows=1, Orientation=Straight, Packaging=Bulk, Pitch=2.5mm, REACH SVHC="No SVHC", Series=XH, Termination=Solder, Voltage Rating=250V, Voltage Rating (AC)=250V, Wire/Cable Gauge=22AWG
J8 J9: library part CMP-1502-03241-3, Contact Resistance=30mΩ, Current Rating=1.5A, Insulation Resistance=1GΩ, Max Operating Temperature=85°C, Min Operating Temperature=-40°C, Operating Supply Voltage=30V, Connector Type=USB, Contact Material="Gold, Nickel", Contact Plating=Gold, Features=Shielded, Gender=Receptacle, Height=7.2mm, Mount="Horizontal, Surface Mount", NexarPartId=52645112, Number of Contacts=4, Number of Pins=4, Orientation=Horizontal, Packaging="Tape and Reel", REACH SVHC=Unknown, RoHS=Compliant, Termination=SMD/SMT, USB Standard="USB 2.0", Voltage Rating=30V
L1_5V_REG_0 L1_5V_REG_1: library part CMP-02424-000785-1, "Commercial Inductors, Low DCR Series 22uH 5A 66mΩ 20%", Case/Package=4040, Current Rating=5A, DC Resistance (DCR)=66mR, Inductance=22uH, Inductance Tolerance=20%, Max DC Current=4.5A, Max Operating Temperature=125°C, Min Operating Temperature=-55°C, Package Quantity=1, Self Resonant Frequency=1MHz, Test Frequency=100kHz, Contact Plating=Tin, Core Material=Metal, Depth=10.3mm, Height=4mm, Height - Seated (Max)=0.157inch, Lead Free="Lead Free", Length=0.43inch, Military Standard=Not, Mount="Surface Mount", Packaging="Tape and Reel", Radiation Hardening=No, Rated Current-Max=5A, RMS Current (Irms)=5A, RoHS Compliant=Yes, Saturation Current=4.5A, Series=IHLP-4040DZ-11, Shielding=Shielded, Termination=SMD/SMT, Tolerance=20%, Width=0.405inch
L2: library part CMP-0227-00094-3, Ambient Temperature Range High=95°C, Ambient Temperature Range Low=-40°C, Case/Package=Nonstandard, Current Rating=1.2A, DC Resistance (DCR)=255mΩ, Inductance=100µH, Inductance Tolerance=30%, Max Operating Temperature=125°C, Self Resonant Frequency=6MHz, Test Frequency=100kHz, Composition=Wirewound, Core Material=Ferrite, Depth=10mm, Height=3.8mm, Height - Seated (Max)=4.0894mm, Length=10mm, Max DC Current=1.2A, Min Operating Temperature=-40°C, Mount="Surface Mount", NexarPartId=8917123, Number of Pins=2, Packaging="Cut Tape (CT)", REACH SVHC=Unknown, Resistance=255mΩ, RMS Current (Irms)=1.2A, RoHS=Compliant, Saturation Current=1.2A, Shielding=Shielded, Termination=SMD/SMT, Tolerance=30%, Weight=1.273007g, Width=10mm
L3: library part CMP-11268-000041-1, "NOT COILCRAFT - ACTUAL P# --> ADL32VHC-220M /  - Power Injection Chokes for PoC", Ambient Temperature Range High=+125°C, Ambient Temperature Range Low=-40°C, Inductance=22uH, Manufacturer=coilcraft, Manufacturer Part Number=1210POC-223MRC, Package=1210POC, Rms Current=700mA, Saturation Current=720mA, Self Resonant Frequency=70MHz, Series Resistance=0.88Ω, Test Frequency=100kHz, Tolerance=20%, Automotive=Yes, Automotive Grade="Grade 1", Category=Ind, ComponentLink2Description=Datasheet, ComponentLink2URL=https://drive.google.com/open?id=15FlOq8Y4YbRFohfA_cJ40jgnqs8va2Mh, Core Material=Ferrite, Device Class L1="Passive Components", Device Class L2=Inductors, Device Class L3="Fixed Inductors", Height=3mm, Lead Free=Yes, Octopart=https://octopart.com/1210poc-223mrc-coilcraft-103207315, RoHS=TRUE